# Altium PCB Driver_Board.PcbDoc (part 1 of 3)
Units mm, origin at the board's own origin, x right, y up, seen from the top; angles counter-clockwise.
Board outline 99.79 x 84.12 mm, 4 copper layers (Top Layer, Layer 1, Layer 2, Bottom Layer), stack 0.603 mm thick; 126 components, 86 nets, 479 pads, 531 vias.
Unrouted connection lines stored in the file: 62.
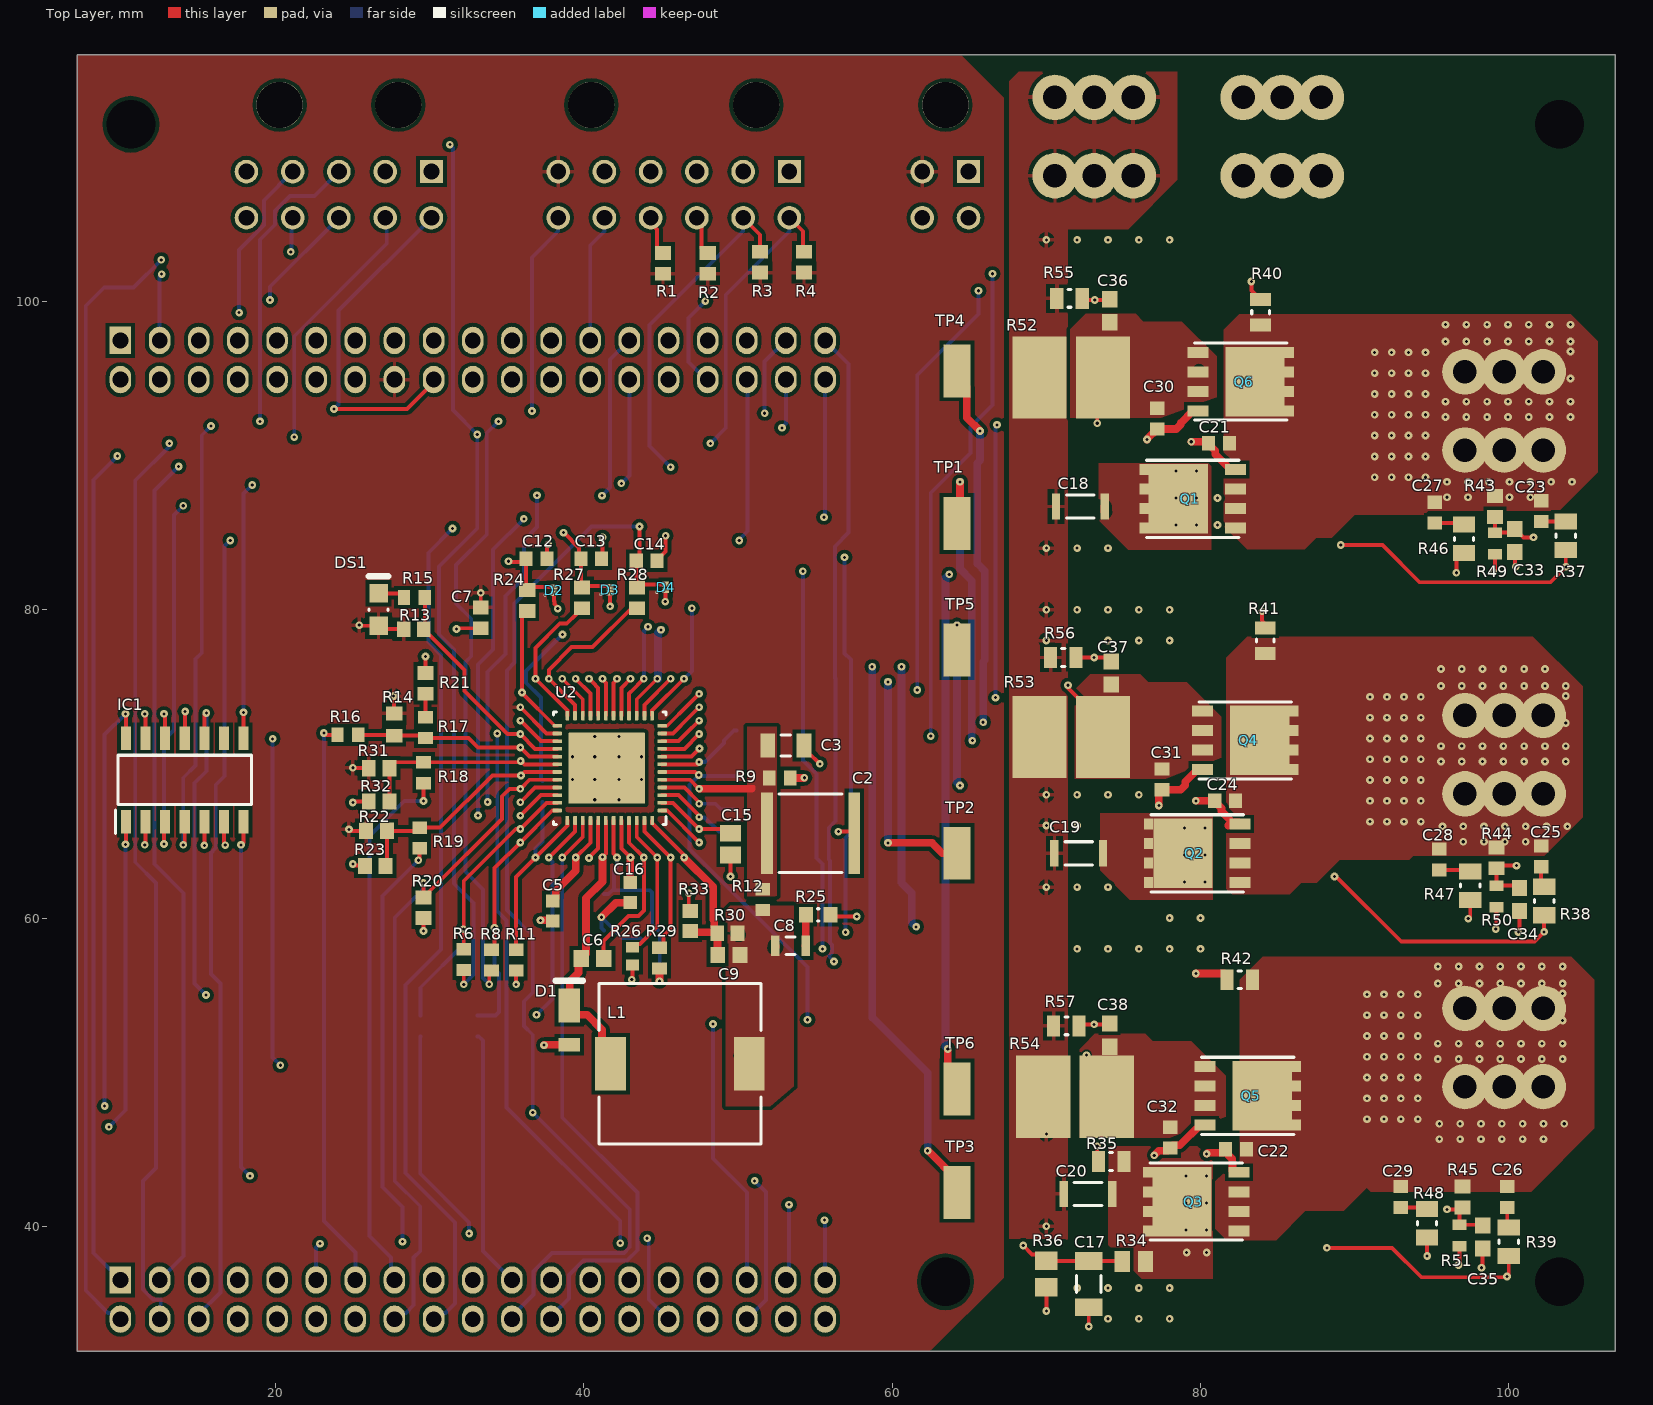
[diagram p0: Top Layer view]
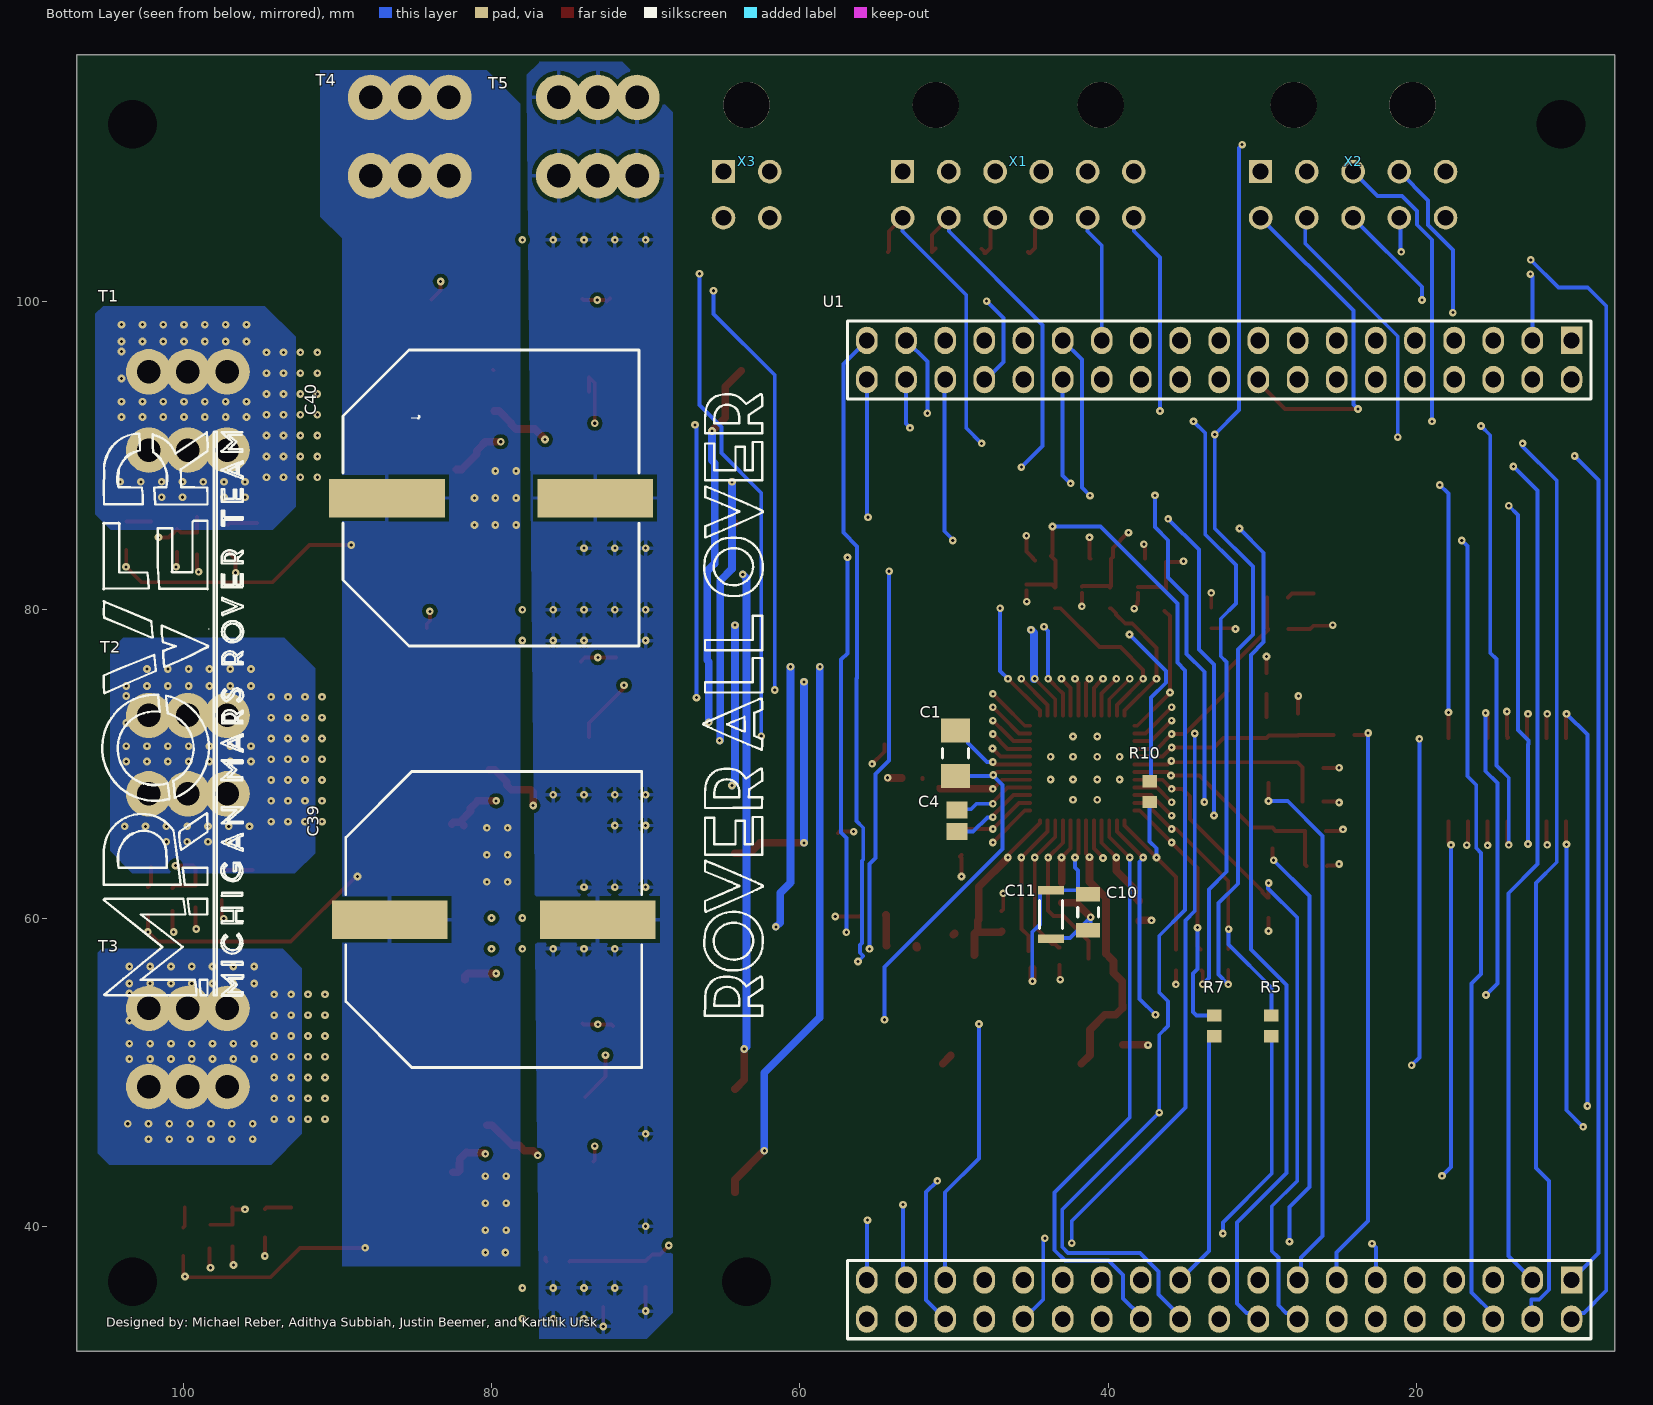
[diagram p1: Bottom Layer view, seen from below]
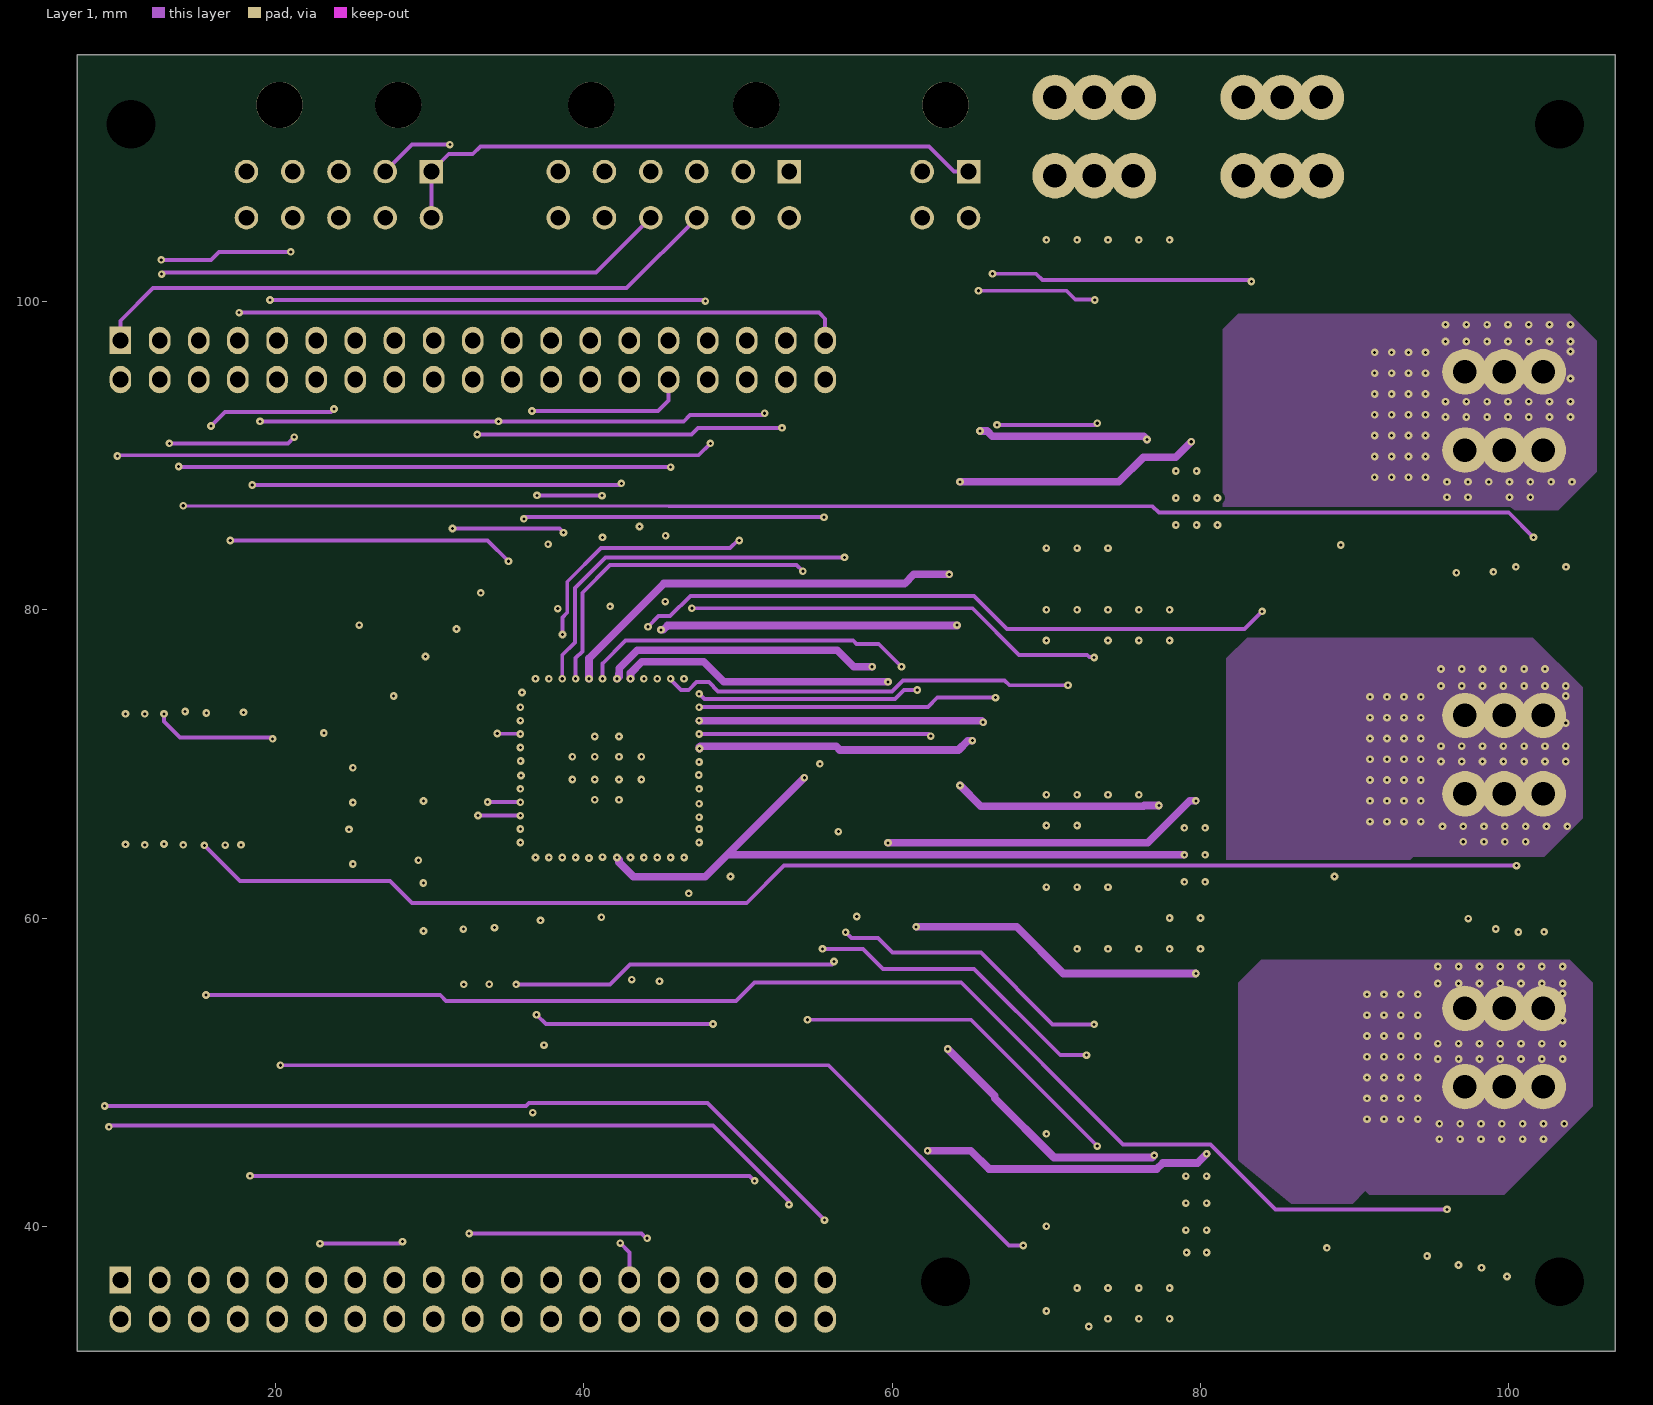
[diagram p2: Layer 1]
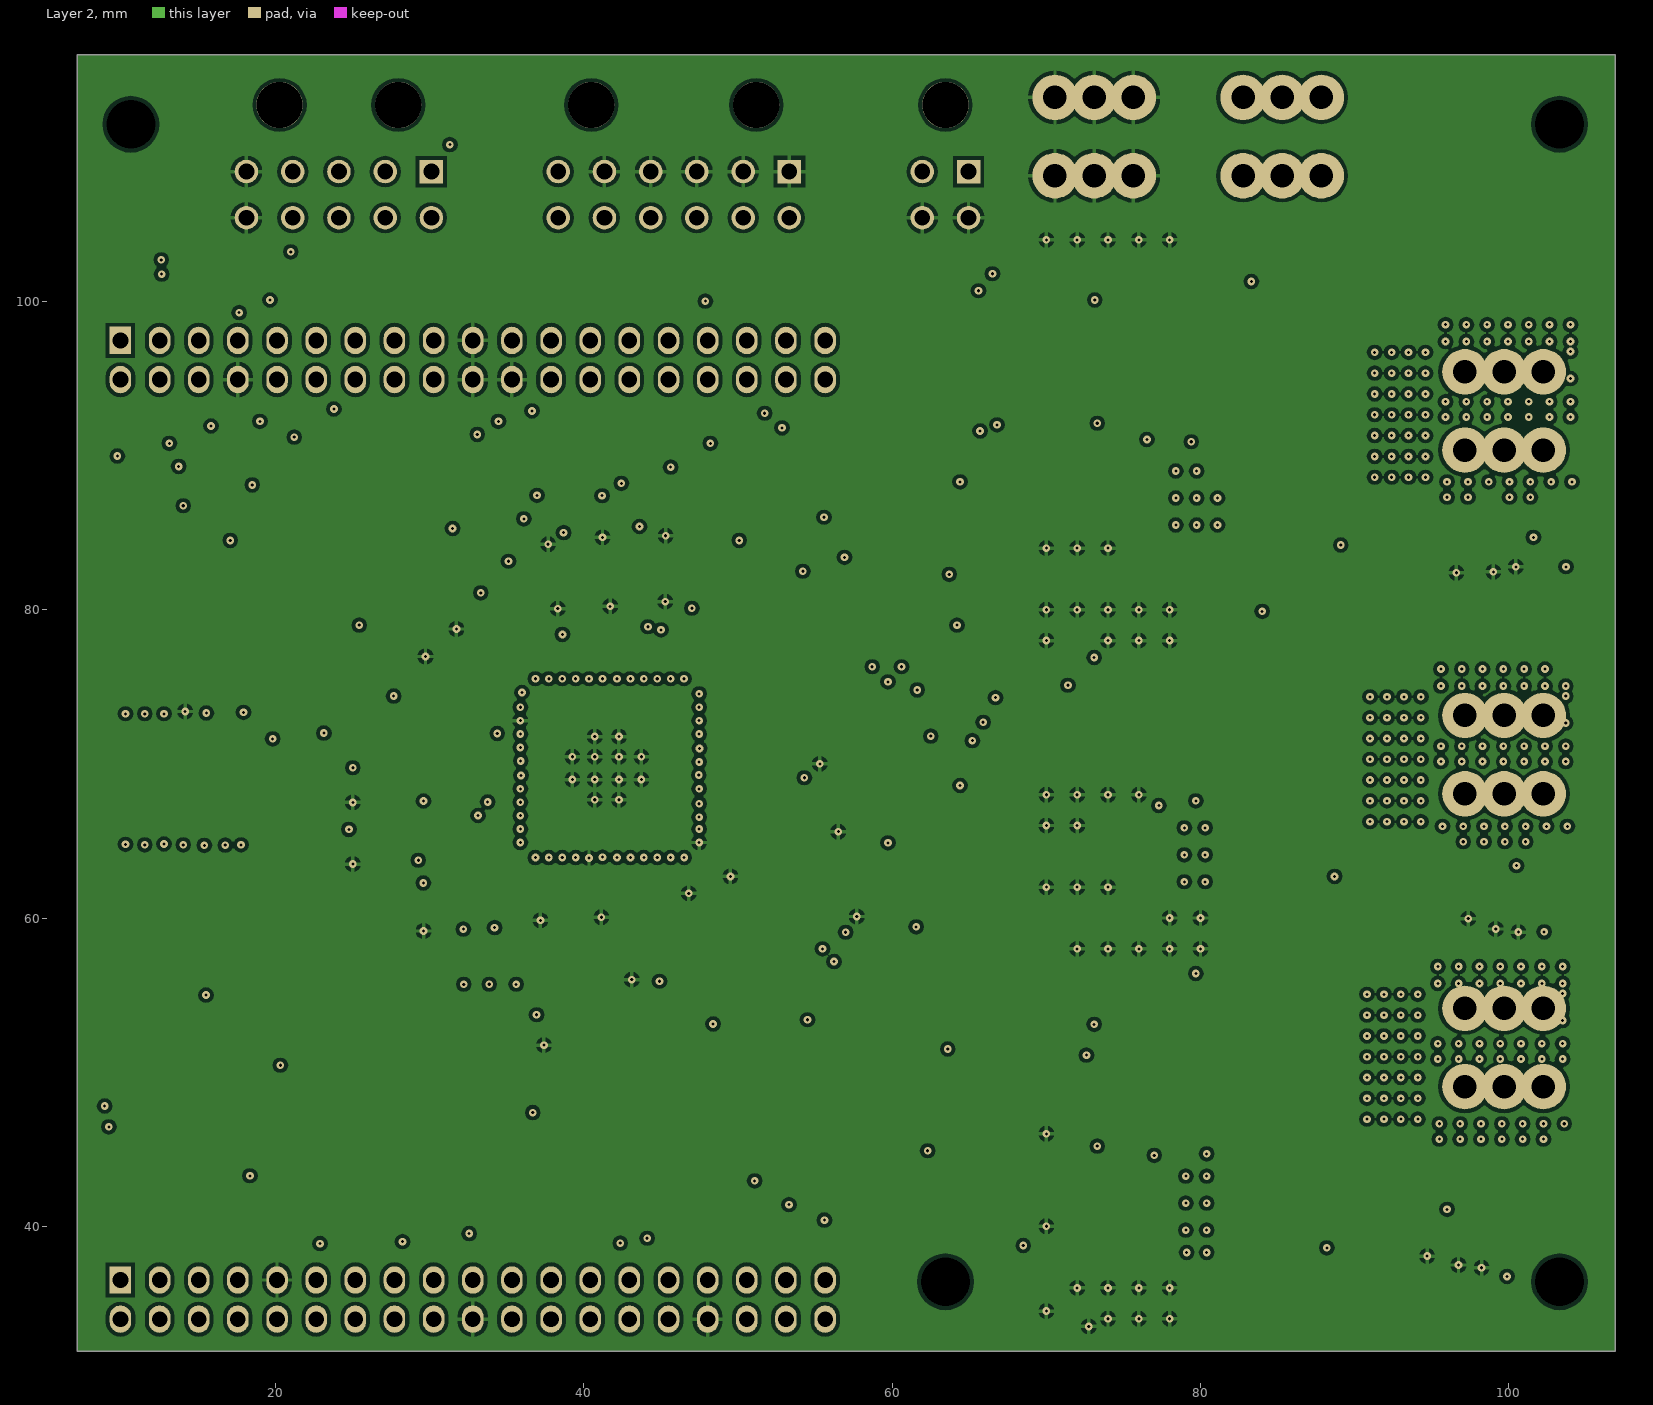
[diagram p3: Layer 2]
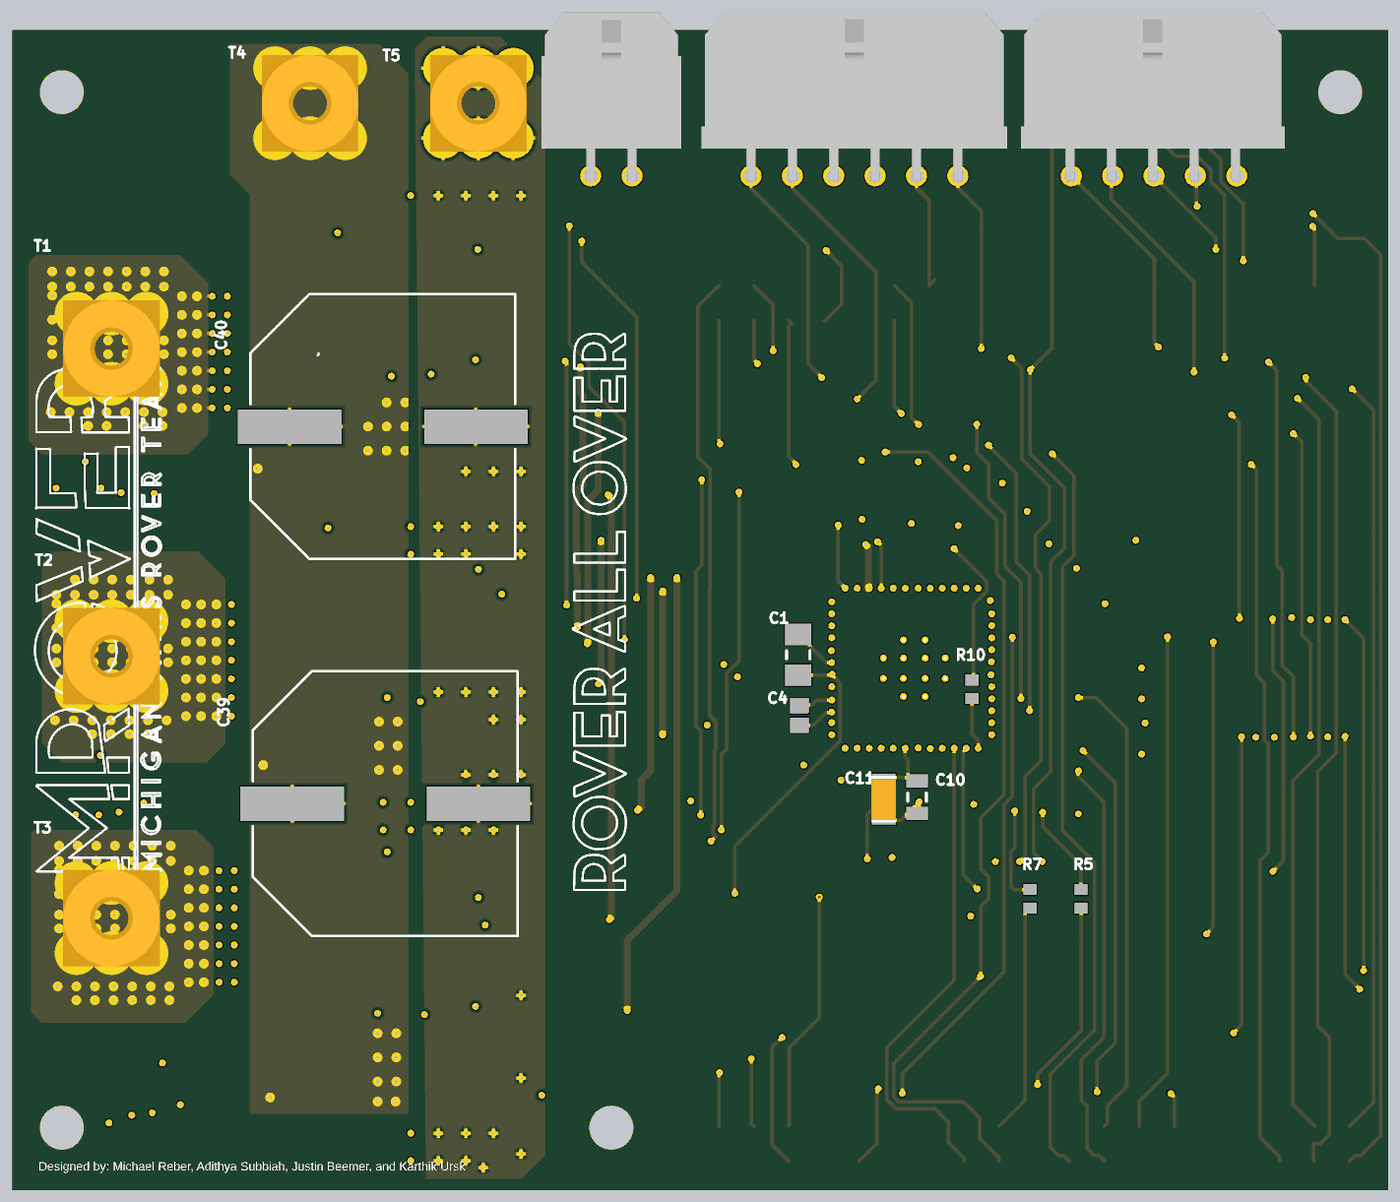
[diagram p5: 3D render of the assembled board from below, using the file's embedded part models]

## Layer stack, top to bottom
Top Solder: solder mask 0.0102, Solder Resist, Dk 3.5
Top Layer: signal copper 0.0356
Dielectric 2: prepreg 0.0711, PP-006, Dk 4.1
Layer 1: signal copper 0.035
Dielectric 1: dielectric 0.32, FR-4, Dk 4.8
Layer 2: signal copper 0.035
Dielectric 3: prepreg 0.0711, PP-006, Dk 4.1
Bottom Layer: signal copper 0.0356
Bottom Solder: solder mask 0.0102, Solder Resist, Dk 3.5

## Board outline
7.112,31.877 106.9,31.877 106.9,116 7.112,116

## Design rules (kind name [scope] priority, off if disabled: settings)
Clearance [All] p1: gap=0.24 ignorepadtopadclearanceinfootprint=FALSE except(0: Arc-Hole Track-Hole SMDPad-Hole THPad-Hole Via-Hole Fill-Hole Poly-Hole Region-Hole Text-Hole)
PolygonConnect DC_Caps [(InComponent('C39') OR InComponent('C40'))] p1: connectstyle=Relief reliefconductorwidth=0.254 reliefentries=4 polygonreliefangle="90 Angle" airgapwidth=0.254
PolygonConnect Shunt_Res [(InComponent('R52') OR InComponent('R53') OR InComponent('R54'))] p2: connectstyle=Direct reliefconductorwidth=0.254 reliefentries=4 polygonreliefangle="90 Angle" airgapwidth=0.254
PolygonConnect SPx [(InNet('SPA') OR InNet('SPB') OR InNet('SPC'))] p3: connectstyle=Direct reliefconductorwidth=0.254 reliefentries=4 polygonreliefangle="90 Angle" airgapwidth=0.254
PolygonConnect VBUCK [InNet('VBUCK')] p4: connectstyle=Direct reliefconductorwidth=0.254 reliefentries=4 polygonreliefangle="90 Angle" airgapwidth=0.254
PolygonConnect DRV_VM [InNet('DRV_VM')] p5: connectstyle=Direct reliefconductorwidth=0.254 reliefentries=4 polygonreliefangle="90 Angle" airgapwidth=0.254
PolygonConnect VM_Power [InNet('VM')Or InNet('MOTA') Or InNet('MOTB') Or InNet('MOTC') Or InComponent('R49') Or InComponent('R50') Or InComponent('R51')] p6: connectstyle=Direct reliefconductorwidth=0.254 reliefentries=4 polygonreliefangle="90 Angle" airgapwidth=0.254
PolygonConnect [All] p7: connectstyle=Relief reliefconductorwidth=0.254 reliefentries=4 polygonreliefangle="90 Angle" airgapwidth=0.254
RoutingVias [All] p1: holewidth=0.711 width=1.27 viastyle="Through Hole" minholewidth=0.711 minwidth=1.27 maxholewidth=0.711 maxwidth=1.27 useviatemplates=TRUE viatemplateguid#1={88C28F50-8440-48BC-975D-7D79779B8CFD} viatemplatename#1=v50h20
SolderMaskExpansion [All] p1: expansion=0.102
Width [All] p1: maxlimit=0.5 minlimit=0.254 preferedwidth=0.254 minimp=50.000000 maximp=50.000000 favimp=50.000000
30 further rules are at their usual default settings.

## Components (designator, comment, footprint, x,y, rotation, side; value= is the part's Value field where it differs from the comment)
C1 "GRM31CR72A105KA01L" CAPC3216X180X55ML20T25 49.9,70.7 r270 bottom
C2 "C5750X7S2A106M230KB" TDK-C5750-2_L 54.7,65.5 r180 top
C3 "C2012X7R2A104K125AA" CAPC2013X145X20ML20 53.1,71.2 r180 top
C4 "C0805C473K1RACTU" CAPC2013X110X50LL20T25 49.8,66.3 r90 bottom
C5 "C0603C105K4RACTU" CAPC1608X90X35LL15T15 37.975,60.45 r90 top
C6 "C0603C103K4RACTU" CAPC1608X87X35ML15T15 40.55,57.375 r180 top
C7 "C0603C104J4RACTU" CAPC1608X87X35NL15T15 33.3,79.475 r90 top
C8 "C2012X7R1H225K125AC" CAPC2013X145X20LL20 53.4,58.2 r180 top
C9 "GRM1885C1H362JA01D" CAPC1608X90X35ML10T15 49.4,57.6 r0 top
C10 "C2012X7R2A104K125AA" CAPC2013X145X20ML20 41.287,60.373 r90 bottom
C11 "C3216X7R2A105K160AA" CAPC3216X180X20LL20 43.7,60.227 r90 bottom
C12 "GRM188R71C222KA01D" CAPC1608X90X35NL10T15 36.917,83.312 r180 top
C13 "GRM188R71C222KA01D" CAPC1608X90X35NL10T15 40.473,83.312 r180 top
C14 "GRM188R71C222KA01D" CAPC1608X90X35NL10T15 44.069,83.185 r180 top
C15 "C0805C105K3RACTU" CAPC2013X140X50LL20T25 49.5,64.8 r90 top
C16 "C0603C105K4RACTU" CAPC1608X90X35LL15T15 43,61.65 r90 top
C17 "CAP 47nF 100V 1206(3216)" CAPC1206(3216)170_N 72.75,36.25 r90 top value=47nF
C18 "C3216X7R2A105K160AA" CAPC3216X180X20LL20 72.2,86.7 r0 top
C19 "C3216X7R2A105K160AA" CAPC3216X180X20LL20 72.1,64.2 r0 top
C20 "C3216X7R2A105K160AA" CAPC3216X180X20LL20 72.7,42.1 r0 top
C21 "GRM188R72A222KA01D" CAPC1608X90X35NL10T15 81.2,90.8 r180 top
C22 "GRM188R72A222KA01D" CAPC1608X90X35NL10T15 82.3,45 r180 top
C23 "GRM188R72A222KA01D" CAPC1608X90X35NL10T15 102.1,86.4 r270 top
C24 "GRM188R72A222KA01D" CAPC1608X90X35NL10T15 81.6,67.6 r180 top
C25 "GRM188R72A222KA01D" CAPC1608X90X35NL10T15 102.1,64 r270 top
C26 "GRM188R72A222KA01D" CAPC1608X90X35NL10T15 99.9,41.9 r270 top
C27 "GRM188R72A222KA01D" CAPC1608X90X35NL10T15 95.2,86.3 r90 top
C28 "GRM188R72A222KA01D" CAPC1608X90X35NL10T15 95.5,63.8 r90 top
C29 "GRM188R72A222KA01D" CAPC1608X90X35NL10T15 93,41.9 r90 top
C30 "GRM188R72A222KA01D" CAPC1608X90X35NL10T15 77.2,92.4 r270 top
C31 "GRM188R72A222KA01D" CAPC1608X90X35NL10T15 77.5,69 r270 top
C32 "GRM188R72A222KA01D" CAPC1608X90X35NL10T15 78.043,45.75 r270 top
C33 "06033C473JAT2A" CAPC1608X90X35NL15T15 100.4,84.5 r90 top
C34 "06033C473JAT2A" CAPC1608X90X35NL15T15 100.7,61.2 r90 top
C35 "06033C473JAT2A" CAPC1608X90X35NL15T15 98.3,39.3 r90 top
C36 "0603YC102KAT2A" CAPC1608X90X35NL15T15 74.1,99.4 r270 top
C37 "0603YC102KAT2A" CAPC1608X90X35NL15T15 74.2,75.9 r270 top
C38 "0603YC102KAT2A" CAPC1608X90X35NL15T15 74.1,52.4 r270 top
C39 "EEV-FK2A331M" SM_RADIAL_K16 79.85,59.9 r180 bottom value=330uF
C40 "EEV-FK2A331M" SM_RADIAL_K16 80.029,87.249 r180 bottom value=330uF
D1 "DFLS1200-7" DIOD-POWERDI123-2_A_V 39.05,53.375 r90 top
D2 "PESD4V0Y1BSF" DFN40P60X32-2M 38.05,81.275 r90 top
D3 "PESD4V0Y1BSF" DFN40P60X32-2M 41.675,81.3 r90 top
D4 "PESD4V0Y1BSF" DFN40P60X32-2M 45.3,81.45 r90 top
DS1 "LTST-C170KRKT" LTST-C170KRKT_V 26.67,80.01 r90 top
IC1 "LM324LVIDR" SOIC127P600X175-14N 14.097,68.961 r90 top
L1 "7447714331" "WE-PD 1050" 46.228,50.546 r0 top
Q1 "CSD19532Q5B" Q5B 79.5,87.2 r0 top
Q2 "CSD19532Q5B" Q5B 79.8,64.2 r0 top
Q3 "CSD19532Q5B" Q5B 79.736,41.6 r0 top
Q4 "CSD19532Q5B" Q5B 82.9,71.527 r180 top
Q5 "CSD19532Q5B" Q5B 83.07,48.465 r180 top
Q6 "CSD19532Q5B" Q5B 82.6,94.8 r180 top
R1 "CRCW060347K0JNEA" RESC1609X50X30ML10T20 45.125,102.475 r270 top
R2 "CRCW060347K0JNEA" RESC1609X50X30ML10T20 48.025,102.475 r270 top
R3 "CRCW060347K0JNEA" RESC1609X50X30ML10T20 51.425,102.55 r270 top
R4 "CRCW060347K0JNEA" RESC1609X50X30ML10T20 54.275,102.55 r270 top
R5 "ERJ-3GEY0R00V" RESC1608X55X30NL15T15 29.4,53 r90 bottom
R6 "ERJ-3GEY0R00V" RESC1608X55X30NL15T15 32.2,57.3 r90 top
R7 "ERJ-3GEY0R00V" RESC1608X55X30NL15T15 33.1,53 r90 bottom
R8 "ERJ-3GEY0R00V" RESC1608X55X30NL15T15 34,57.275 r90 top
R9 "ERJ-3GEY0R00V" RESC1608X55X30NL15T15 52.705,69.088 r180 top
R10 "ERJ-3GEY0R00V" RESC1608X55X30NL15T15 37.3,68.2 r90 bottom
R11 "ERJ-3GEY0R00V" RESC1608X55X30NL15T15 35.6,57.275 r90 top
R12 "ERJ-3GEY0R00V" RESC1608X55X30NL15T15 51.6,61.2 r90 top
R13 "RG1608P-103-B-T5" RESC1608X50X30NL20T20 28.956,78.74 r180 top
R14 "ERJ-3GEYJ102V" RESC1608X55X30ML15T15 27.686,72.554 r90 top
R15 "ERJ3EKF3300V" RESC1608X55X30NL15T15 29,80.8 r180 top
R16 "ERJ-3GEY0R00V" RESC1608X55X30NL15T15 24.678,71.882 r0 top
R17 "ERJ-3GEY0R00V" RESC1608X55X30NL15T15 29.718,72.35 r270 top
R18 "ERJ-3GEY0R00V" RESC1608X55X30NL15T15 29.591,69.429 r90 top
R19 "ERJ-3GEY0R00V" RESC1608X55X30NL15T15 29.337,65.191 r90 top
R20 "CRCW060347K0JNEA" RESC1609X50X30ML10T20 29.591,60.666 r90 top
R21 "CRCW060347K0JNEA" RESC1609X50X30ML10T20 29.718,75.224 r270 top
R22 "CRCW060375K0JNEA" RESC1609X50X30ML10T20 26.543,65.659 r0 top
R23 "CRCW060375K0JNEA" RESC1609X50X30ML10T20 26.456,63.373 r180 top
R24 "CRCW060356R0FKEA" RESC1609X50X30ML10T20 36.322,80.605 r270 top
R25 "2R61 1% 0603(1608)" RESC0603(1608)_N 55.2,60.2 r180 top value="2.61 Ohm"
R26 "CRCW0603107KFKEA" RESC1609X50X30LL10T20 43.15,57.525 r270 top
R27 "CRCW060356R0FKEA" RESC1609X50X30ML10T20 39.878,80.772 r270 top
R28 "CRCW060356R0FKEA" RESC1609X50X30ML10T20 43.434,80.772 r270 top
R29 "ERJ-3EKF2743V" RESC1608X55X30NL15T15 44.9,57.4 r270 top
R30 "RG1608P-103-B-T5" RESC1608X50X30NL20T20 49.3,59 r0 top
R31 "CRCW060375K0JNEA" RESC1609X50X30ML10T20 26.71,69.723 r0 top
R32 "CRCW060375K0JNEA" RESC1609X50X30ML10T20 26.71,67.564 r180 top
R33 "RG1608P-2611-B-T5" RESC1608X50X30NL20T20 46.9,59.8 r270 top
R34 "ERA6AEB3833V" RESC2013X60X40LL20T25 75.68,37.719 r0 top
R35 "CRCW08050000Z0EA" RESC2013X50X30LL20T20 74.2,44.2 r0 top
R36 "ERA6AEB9761V" RESC2013X60X40NL20T25 70,36.9 r90 top
R37 "CRCW08052R70JNEA" RESC2013X50X30NL20T20 103.7,84.8 r270 top
R38 "CRCW08052R70JNEA" RESC2013X50X30NL20T20 102.3,61.1 r270 top
R39 "CRCW08052R70JNEA" RESC2013X50X30NL20T20 100,39 r270 top
R40 "CRCW08050000Z0EA" RESC2013X50X30LL20T20 83.9,99.3 r270 top
R41 "CRCW08050000Z0EA" RESC2013X50X30LL20T20 84.2,78 r270 top
R42 "CRCW08050000Z0EA" RESC2013X50X30LL20T20 82.55,56 r0 top
R43 "CRCW0603383KFKEA" RESC1609X50X30ML10T20 99.1,86.7 r90 top
R44 "CRCW0603383KFKEA" RESC1609X50X30ML10T20 99.2,63.9 r90 top
R45 "CRCW0603383KFKEA" RESC1609X50X30ML10T20 97,41.9 r90 top
R46 "CRCW08052R70JNEA" RESC2013X50X30NL20T20 97.1,84.6 r90 top
R47 "CRCW08052R70JNEA" RESC2013X50X30NL20T20 97.5,62.1 r90 top
R48 "CRCW08052R70JNEA" RESC2013X50X30NL20T20 94.7,40.2 r90 top
R49 "RC0603FR-079K76L" RESC1608X55X25NL10T15 99.1,84.3 r270 top
R50 "RC0603FR-079K76L" RESC1608X55X25NL10T15 99.2,61.4 r270 top
R51 "RC0603FR-079K76L" RESC1608X55X25NL10T15 96.8,39.4 r270 top
R52 "WSHM2818" PCBComponent_1 73.67,95.075 r90 top
R53 "WSHM2818" PCBComponent_1 73.67,71.75 r90 top
R54 "WSHM2818" PCBComponent_1 73.92,48.4 r90 top
R55 "CRCW08050000Z0EA" RESC2013X50X30LL20T20 71.5,100.2 r180 top
R56 "CRCW08050000Z0EA" RESC2013X50X30LL20T20 71.1,76.9 r180 top
R57 "CRCW08050000Z0EA" RESC2013X50X30LL20T20 71.3,53 r180 top
T1 "Wurth Electronics 7461057" "Redcube 7461057" 99.7,92.9 r180 bottom
T2 "Wurth Electronics 7461057" "Redcube 7461057" 99.7,70.6 r180 bottom
T3 "Wurth Electronics 7461057" "Redcube 7461057" 99.7,51.6 r180 bottom
T4 "Wurth Electronics 7461057" "Redcube 7461057" 85.3,110.7 r180 bottom
T5 "Wurth Electronics 7461057" "Redcube 7461057" 73.1,110.7 r180 bottom
TP1 "5015" KSTN-5015_V 64.2,85.6 r90 top
TP2 "5015" KSTN-5015_V 64.2,64.2 r270 top
TP3 "5015" KSTN-5015_V 64.2,42.2 r90 top
TP4 "5015" KSTN-5015_V 64.2,95.5 r90 top
TP5 "5015" KSTN-5015_V 64.2,77.4 r90 top
TP6 "5015" KSTN-5015_V 64.2,48.9 r90 top
U1 "STM Nucleo-F303RE" "Nucleo MORPHO CONNECTORS" -12.427,72.075 r270 bottom locked
U2 "DRV8353RSRGZR" DRV8353RS 41.483,69.723 r0 top
X1 "Molex - Micro-Fit 3.0 Series connector,  3.00mm (0.118\") pitch header, 12 positions." 43045-1200 45.825,112.751 r0 bottom
X2 "Molex - Micro-Fit 3.0 Series connector,  3.00mm (0.118\") pitch header, 10 positions." 43045-1000 24.1,112.751 r0 bottom
X3 "Molex - Micro-Fit 3.0 Series connector,  3.00mm (0.118\") pitch header, 4 positions." 43045-0400 63.45,112.751 r0 bottom

## Footprints (in the part's own frame and the unit in brackets; to place one, negate y for a bottom-side part, rotate by r counter-clockwise, add the part's x,y. Pads: shape width x height; smd on the part's side, far side on the other; paste and mask are expansions set on the pad)
43045-0400 [mm]
  round 3 hole 3 unplated: 1(0,0)
  rect 1.482x1.482 / inner rect 1.524x1.524 / far side rect 1.482x1.482 hole 1.02: P$1(1.5,4.32)
  round 1.53 / inner round 1.524 / far side round 1.53 hole 1.02: P$2(-1.5,4.32) P$3(1.5,7.32) P$4(-1.5,7.32)
  body extent -5.07,-4.55 5.08,7.69, height 8.83
43045-1000 [mm]
  round 3 hole 3 unplated: 1(-3.85,0) 1(3.85,0)
  rect 1.482x1.482 / inner rect 1.524x1.524 / far side rect 1.482x1.482 hole 1.02: P$1(6,4.32)
  round 1.53 / inner round 1.524 / far side round 1.53 hole 1.02: P$2(3,4.32) P$3(0,4.32) P$4(-3,4.32) P$5(-6,4.32) P$6(6,7.32) P$7(3,7.32) P$8(0,7.32) P$9(-3,7.32) P$10(-6,7.32)
  body extent -9.49,-4.57 9.66,7.67, height 8.53
43045-1200 [mm]
  round 3 hole 3 unplated: 1(-5.35,0) 1(5.35,0)
  rect 1.482x1.482 / inner rect 1.524x1.524 / far side rect 1.482x1.482 hole 1.02: P$1(7.5,4.32)
  round 1.53 / inner round 1.524 / far side round 1.53 hole 1.02: P$2(4.5,4.32) P$3(1.5,4.32) P$4(-1.5,4.32) P$5(-4.5,4.32) P$6(-7.5,4.32) P$7(7.5,7.32) P$8(4.5,7.32) P$9(1.5,7.32) P$10(-1.5,7.32) P$11(-4.5,7.32) P$12(-7.5,7.32)
  body extent -11.07,-4.57 11.08,7.67, height 8.52
CAPC1206(3216)170_N [mm] "Chip Capacitor, Body 3.2x1.6mm, Height 1.7mm, IPC Medium Density"
  rect 1.15x1.8 smd: 1(-1.5,0) 2(1.5,0)
  silkscreen extent -0.55,-0.8 0.55,0.8, body extent -1.7,-0.9 1.7,0.9, height 1.7
CAPC1608X87X35ML15T15 [mm] "Chip Capacitor, 2-Leads, Body 1.60x0.80mm, IPC Low Density"
  rect 1x1.1 smd: 1(-0.725,0) 2(0.725,0)
  body extent -0.87,-0.48 0.87,0.47, height 0.87
CAPC1608X87X35NL15T15 [mm] "Chip Capacitor, 2-Leads, Body 1.60x0.80mm, IPC Medium Density"
  rect 0.9x1 smd: 1(-0.675,0) 2(0.675,0)
  body extent -0.87,-0.48 0.87,0.47, height 0.87
CAPC1608X90X35LL15T15 [mm] "Chip Capacitor, 2-Leads, Body 1.60x0.81mm, IPC High Density"
  rect 0.85x0.9 smd: 1(-0.65,0) 2(0.65,0)
  body extent -0.88,-0.48 0.87,0.48, height 0.9
CAPC1608X90X35ML10T15 [mm] "Chip Capacitor, 2-Leads, Body 1.60x0.80mm, IPC Low Density"
  rect 0.95x1.05 smd: 1(-0.725,0) 2(0.725,0)
  body extent -0.85,-0.45 0.85,0.45, height 0.9
CAPC1608X90X35NL10T15 [mm] "Chip Capacitor, 2-Leads, Body 1.60x0.80mm, IPC Medium Density"
  rect 0.85x0.95 smd: 1(-0.675,0) 2(0.675,0)
  body extent -0.85,-0.45 0.85,0.45, height 0.9
CAPC1608X90X35NL15T15 [mm] "Chip Capacitor, 2-Leads, Body 1.60x0.81mm, IPC Medium Density"
  rect 1.05x1 smd: 1(-0.75,0) 2(0.75,0)
  body extent -0.88,-0.48 0.87,0.48, height 0.9
CAPC2013X110X50LL20T25 [mm] "Chip Capacitor, 2-Leads, Body 2.00x1.25mm, IPC High Density"
  rect 1.1x1.35 smd: 1(-0.7,0) 2(0.7,0)
  body extent -1.1,-0.72 1.1,0.72, height 1.1
CAPC2013X140X50LL20T25 [mm] "Chip Capacitor, 2-Leads, Body 2.00x1.25mm, IPC High Density"
  rect 1.1x1.35 smd: 1(-0.7,0) 2(0.7,0)
  body extent -1.1,-0.72 1.1,0.72, height 1.4
CAPC2013X145X20LL20 [mm] "Chip Capacitor, 2-Leads, Body 2.20x1.45mm, IPC High Density"
  rect 0.55x1.35 smd: 1(-0.975,0) 2(0.975,0)
  silkscreen extent -0.3,-0.58 0.3,0.58, body extent -1.1,-0.72 1.1,0.72, height 1.45
CAPC2013X145X20ML20 [mm] "Chip Capacitor, 2-Leads, Body 2.20x1.45mm, IPC Low Density"
  rect 0.95x1.55 smd: 1(-1.175,0) 2(1.175,0)
  silkscreen extent -0.3,-0.67 0.3,0.67, body extent -1.1,-0.72 1.1,0.72, height 1.45
CAPC3216X180X20LL20 [mm] "Chip Capacitor, 2-Leads, Body 3.40x1.80mm, IPC High Density"
  rect 0.55x1.7 smd: 1(-1.575,0) 2(1.575,0)
  silkscreen extent -0.9,-0.75 0.9,0.75, body extent -1.7,-0.9 1.7,0.9, height 1.8
CAPC3216X180X55ML20T25 [mm] "Chip Capacitor, 2-Leads, Body 3.4x1.8mm, IPC Low Density"
  rect 1.55x1.9 smd: 1(-1.475,0) 2(1.475,0)
  silkscreen extent -0.3,-0.85 0.3,0.85, body extent -1.7,-0.9 1.7,0.9, height 1.8
DFN40P60X32-2M [mm] "DFN, 2-Leads, Body 0.30x0.60mm, Pitch 0.40mm, IPC Low Density"
  rect 0.35x0.45 smd: 1(-0.2,0) 2(0.2,0)
  silkscreen extent -0.36,0.52 -0.27,0.61, body extent -0.31,-0.16 0.31,0.16, height 0.32
DIOD-POWERDI123-2_A_V [mm] "SOD, 2-Leads, Body 2.8x1.78mm"
  rect 0.9x1.4 smd: 1(-1.6,0)
  rect 2.2x1.4 smd: 2(0.95,0)
  silkscreen extent 2.55,-0.89 2.55,0.89, body extent -1.4,-0.89 1.4,0.89, height 1.01
DRV8353RS [mm]
  rrect42% 0.6x0.24 smd: 1(3.588,-2.75) 2(3.588,-2.25) 3(3.588,-1.75) 4(3.588,-1.25) 5(3.588,-0.75) 6(3.588,-0.25) 7(3.588,0.25) 8(3.588,0.75) 9(3.588,1.25) 10(3.588,1.75) 11(3.588,2.25) 12(3.588,2.75) 25(-3.212,2.75) 26(-3.212,2.25) 27(-3.212,1.75) 28(-3.212,1.25) 29(-3.212,0.75) 30(-3.212,0.25) 31(-3.212,-0.25) 32(-3.212,-0.75) 33(-3.212,-1.25) 34(-3.212,-1.75) 35(-3.212,-2.25) 36(-3.212,-2.75)
  rrect42% 0.24x0.6 smd: 13(2.938,3.4) 14(2.438,3.4) 15(1.938,3.4) 16(1.438,3.4) 17(0.938,3.4) 18(0.438,3.4) 19(-0.062,3.4) 20(-0.562,3.4) 21(-1.062,3.4) 22(-1.562,3.4) 23(-2.062,3.4) 24(-2.562,3.4) 37(-2.562,-3.4) 38(-2.062,-3.4) 39(-1.562,-3.4) 40(-1.062,-3.4) 41(-0.562,-3.4) 42(-0.062,-3.4) 43(0.438,-3.4) 44(0.938,-3.4) 45(1.438,-3.4) 46(1.938,-3.4) 47(2.438,-3.4) 48(2.938,-3.4)
  rrect8% 1.37x1.28 on Top Paste: 49(-1.57,-1.48) 49(-1.57,0) 49(-1.57,1.48) 49(0,-1.48) 49(0,0) 49(0,1.48) 49(1.57,-1.48) 49(1.57,0) 49(1.57,1.48)
  rrect2% 4.975x4.6 smd paste-2.575: 49(0,0)
  silkscreen extent -3.46,-3.65 3.84,3.65, body extent -3.31,-3.5 3.69,3.5, height 1
KSTN-5015_V [mm] "SMD, Body 2.63x1.02mm"
  rect 3.43x1.78 smd: 1(0,0)
  body extent -1.53,-0.51 1.53,0.49, height 1.49
LTST-C170KRKT_V [mm] "SMD, 2-Leads, Body 2x1.25mm"
  rect 1.2x1.2 smd: 1(-1.05,0) 2(1.05,0)
  silkscreen extent -0.05,-0.63 2.16,0.64, body extent -1,-0.63 1,0.63, height 1.2
"Nucleo MORPHO CONNECTORS" [mil] "STM32F401RE Nucleo - Morpho Connectors"
  rect 70x55 hole 40: 1(-1000,-880) 39(1400,-880)
  oval 70x55 hole 40: 2(-1000,-980) 3(-1000,-1080) 4(-1000,-1180) 5(-1000,-1280) 6(-1000,-1380) 7(-1000,-1480) 8(-1000,-1580) 9(-1000,-1680) 10(-1000,-1780) 11(-1000,-1880) 12(-1000,-1980) 13(-1000,-2080) 14(-1000,-2180) 15(-1000,-2280) 16(-1000,-2380) 17(-1000,-2480) 18(-1000,-2580) 19(-1000,-2680) 20(-900,-880) 21(-900,-980) 22(-900,-1080) 23(-900,-1180) 24(-900,-1280) 25(-900,-1380) 26(-900,-1480) 27(-900,-1580) 28(-900,-1680) 29(-900,-1780) 30(-900,-1880) 31(-900,-1980) 32(-900,-2080) 33(-900,-2180) 34(-900,-2280) 35(-900,-2380) 36(-900,-2480) 37(-900,-2580) 38(-900,-2680) 40(1400,-980) 41(1400,-1080) 42(1400,-1180) 43(1400,-1280) 44(1400,-1380) 45(1400,-1480) 46(1400,-1580) 47(1400,-1680) 48(1400,-1780) 49(1400,-1880) 50(1400,-1980) 51(1400,-2080) 52(1400,-2180) 53(1400,-2280) 54(1400,-2380) 55(1400,-2480) 56(1400,-2580) 57(1400,-2680) 58(1500,-880) 59(1500,-980) 60(1500,-1080) 61(1500,-1180) 62(1500,-1280) 63(1500,-1380) 64(1500,-1480) 65(1500,-1580) 66(1500,-1680) 67(1500,-1780) 68(1500,-1880) 69(1500,-1980) 70(1500,-2080) 71(1500,-2180) 72(1500,-2280) 73(1500,-2380) 74(1500,-2480) 75(1500,-2580) 76(1500,-2680)
  silkscreen extent -1050,-2730 1550,-830
PCBComponent_1 [mm]
  rect 5.33x3.51 smd: 1(0,0) 2(0,4.12)
Q5B [mm]
  rect 1.372x0.71 smd: 1(2.77,-1.905) 2(2.77,-0.635) 3(2.77,0.635) 4(2.77,1.905)
  rect 0.59x0.71 smd: 5(-3.161,1.905) 6(-3.161,0.635) 7(-3.161,-0.635) 8(-3.161,-1.905)
  rect 3.85x4.52 smd: 9(-0.936,0)
  silkscreen extent -3,-2.5 3,2.5
"Redcube 7461057" [mm] "Wurth Electronics"
  round 2.95 hole 1.525: 1(-2.54,2.54) 2(0,2.54) 3(2.54,2.54) 4(-2.54,-2.54) 5(0,-2.54) 6(2.54,-2.54)
  body extent -3.5,-3.5 3.5,3.5, height 6
RESC0603(1608)_N [mm] "Chip Resistor, Body 1.6x0.8mm, IPC Medium Density"
  rect 0.9x1 smd: 1(-0.8,0) 2(0.8,0)
  silkscreen extent -0.05,-0.4 0.05,0.4, body extent -0.85,-0.47 0.85,0.47, height 0.6
RESC1608X50X30NL20T20 [mm] "Chip Resistor, 2-Leads, Body 1.60x0.80mm, IPC Medium Density"
  rect 0.9x1 smd: 1(-0.65,0) 2(0.65,0)
  body extent -0.9,-0.5 0.9,0.5, height 0.5
RESC1608X55X25NL10T15 [mm] "Chip Resistor, 2-Leads, Body 1.60x0.80mm, IPC Medium Density"
  rect 0.7x0.9 smd: 1(-0.7,0) 2(0.7,0)
  body extent -0.85,-0.45 0.85,0.45, height 0.55
RESC1608X55X30ML15T15 [mm] "Chip Resistor, 2-Leads, Body 1.60x0.80mm, IPC Low Density"
  rect 0.9x1.05 smd: 1(-0.725,0) 2(0.725,0)
  body extent -0.87,-0.48 0.87,0.48, height 0.55
RESC1608X55X30NL15T15 [mm] "Chip Resistor, 2-Leads, Body 1.60x0.80mm, IPC Medium Density"
  rect 0.8x0.95 smd: 1(-0.675,0) 2(0.675,0)
  body extent -0.87,-0.48 0.87,0.48, height 0.55
RESC1609X50X30LL10T20 [mm] "Chip Resistor, 2-Leads, Body 1.55x0.85mm, IPC High Density"
  rect 0.7x0.85 smd: 1(-0.575,0) 2(0.575,0)
  body extent -0.82,-0.48 0.82,0.48, height 0.5
RESC1609X50X30ML10T20 [mm] "Chip Resistor, 2-Leads, Body 1.55x0.85mm, IPC Low Density"
  rect 0.9x1.05 smd: 1(-0.675,0) 2(0.675,0)
  body extent -0.82,-0.48 0.82,0.48, height 0.5
RESC2013X50X30LL20T20 [mm] "Chip Resistor, 2-Leads, Body 2.00x1.25mm, IPC High Density"
  rect 0.85x1.35 smd: 1(-0.825,0) 2(0.825,0)
  silkscreen extent -0.1,-0.58 0.1,0.58, body extent -1.1,-0.72 1.1,0.72, height 0.5
RESC2013X50X30NL20T20 [mm] "Chip Resistor, 2-Leads, Body 2.00x1.25mm, IPC Medium Density"
  rect 1.05x1.45 smd: 1(-0.925,0) 2(0.925,0)
  silkscreen extent -0.1,-0.63 0.1,0.63, body extent -1.1,-0.72 1.1,0.72, height 0.5
RESC2013X60X40LL20T25 [mm] "Chip Resistor, 2-Leads, Body 2.00x1.25mm, IPC High Density"
  rect 1x1.35 smd: 1(-0.75,0) 2(0.75,0)
  body extent -1.1,-0.72 1.1,0.72, height 0.6
RESC2013X60X40NL20T25 [mm] "Chip Resistor, 2-Leads, Body 2.00x1.25mm, IPC Medium Density"
  rect 1.2x1.45 smd: 1(-0.85,0) 2(0.85,0)
  body extent -1.1,-0.72 1.1,0.72, height 0.6
SM_RADIAL_K16 [mm] "18 x 16.5mm:  Panasonic K16 (K18 from land pattern recommendation)"
  rect 7.5x2.5 smd: 1(-6.75,0) 2(6.75,0)
  silkscreen extent -9.6,-9.6 9.6,9.6, body extent -9.6,-9.6 9.6,9.6, height 17
SOIC127P600X175-14N [mm]
  rect 1.525x0.65 smd: 1(-2.712,3.81) 2(-2.712,2.54) 3(-2.712,1.27) 4(-2.712,0) 5(-2.712,-1.27) 6(-2.712,-2.54) 7(-2.712,-3.81) 8(2.712,-3.81) 9(2.712,-2.54) 10(2.712,-1.27) 11(2.712,0) 12(2.712,1.27) 13(2.712,2.54) 14(2.712,3.81)
  silkscreen extent -3.47,-4.33 1.6,4.48, body extent -3,-4.33 3,4.33, height 1.75
TDK-C5750-2_L [mm] "SMD, 2-Leads, Body 6.1x5.4mm, IPC High Density"
  rect 0.75x5.3 smd: 1(-2.825,0) 2(2.825,0)
  silkscreen extent -2.05,-2.55 2.05,2.55, body extent -3.05,-2.7 3.05,2.7, height 2.5
"WE-PD 1050" [mm] "SMD Inductor, 2-Leads, Body 10,0x10,0mm"
  rect 2x3.5 smd: 1(-4.5,0) 2(4.5,0)
  silkscreen extent -5.25,-5.2 5.25,5.2, body extent -5,-5 5,5, height 4.75

## Part data
C1: library part CMP-2000-04948-1, "Chip Capacitor, 1 uF, +/- 10%, 100 V, -55 to 125 degC, 1206 (3216 Metric), RoHS, Tape and Reel", Capacitance=1µF, Manufacturer=Murata, Operating Temperature=-55degC~125degC, Package / Case=1206(3216Metric), Package Description="2-Pin Surface Mount Device, Body 3.2 x 1.6 mm", Package Reference=1206, Ratings=-, Standard Package=1, Temperature Coefficient=X7R, Tolerance=±10%, Voltage - Rated=100V, Applications=GeneralPurpose, Catalog Drawings=GRMSeries_1206_1.6, Category=Capacitors, Datasheet URL=https://datasheet.ciiva.com/29199/454987-da-01-en-vs-kondensator-1206-29199435.pdf, Datasheet Version=Sep-11, Family=CeramicCapacitors, Featured Product=GA3SafetyRecognizedCapsandHi-CapMLCC, Features=-, Height - Seated (Max)=-, Lead Spacing=-, Lead Style=-, Manufacturer URL=http://www.murata.com/, Mounting Type=SurfaceMount,MLCC, Online Catalog=GRMSeries, Other Names=490-3909-6, Packaging=Digi-Reel, Product Training Modules=High-CapMultilayerCeramicCapacitors, Series=GRM, Size / Dimension="0.126\"Lx0.063\"W(3.20mmx1.60mm)", Thickness (Max)="0.071\"(1.80mm)"
C2: library part CMP-2000-06059-1, "Chip Capacitor, 10 uF, +/- 20%, 100 V, -55 to 125 degC, 2220 (5750 Metric), RoHS, Tape and Reel", Capacitance=10µF, Manufacturer=TDK, Operating Temperature=-55°C~125°C, Package / Case=2220(5750Metric), Package Description="SMD, 2-Leads, Body 6.1 x 5.4 mm", Package Reference=C5750-2, PCN Part Number=MLCCPartNumberChange30/Nov/2012, Ratings=-, Standard Package=1, Temperature Coefficient=X7S, Tolerance=±20%, Voltage - Rated=100V, Applications=GeneralPurpose, Catalog Drawings=CSERIES_2220_2.5, Category=Capacitors, Datasheet URL=https://datasheet.ciiva.com/24216/c5750x7s2a106m230kb-265716-24216594.pdf, Datasheet Version=09/2013, Family=CeramicCapacitors, Featured Product=Compact,High-CapacitanceMultilayerCeramicChipCapacitorsMidVoltageX7S-100VMLCCsC-SeriesMidVoltageMLCCs, Features=-, Height - Seated (Max)=-, Kits=445-9009-KIT-ND-KITCAPCERHICAP100V-630VSMDSAMPLEKIT1008-ND-KITCAPCERMLCC100V-630V, Lead Spacing=-, Lead Style=-, Manufacturer URL=http://www.tdk.com/, Mounting Technology=SurfaceMount, Mounting Type=SurfaceMount,MLCC, Online Catalog=CSeries,MidVoltage, Other Names=445-5212-1, Packaging=CutTape(CT), Product Training Modules=SEAT,CCV,andTVCLDesignToolsCSeriesMidVoltageCapacitorsFamilyGuidetoReplacinganElectrolyticCapacitorwithanMLCC, RoHS Information=RoHSCertificate-MLCC, Series=C, Size / Dimension="0.224\"Lx0.197\"W(5.70mmx5.00mm)", Thickness (Max)="0.098\"(2.50mm)"
C3: library part CMP-2000-05453-1, "Chip Capacitor, 100 nF, +/- 10%, 100 V, -55 to 1255 degC, 0805 (2012 Metric), RoHS, Tape and Reel", Capacitance=0.1µF, Manufacturer=TDK, Operating Temperature=-55degC~125degC, Package / Case=0805(2012Metric), Package Description="2-Pin Surface Mount Device, Body 2 x 1.25 mm", Package Reference=805, PCN Part Number=MLCCPartNumberChange30/Nov/2012, Ratings=-, Standard Package=1, Temperature Coefficient=X7R, Tolerance=±10%, Voltage - Rated=100V, Applications=GeneralPurpose, Catalog Drawings=CSERIES_2012-0805_1.45, Category=Capacitors, Datasheet URL=https://datasheet.ciiva.com/11788/0900766b80fc5cba-11788142.pdf, Datasheet Version=Jul-13, Family=CeramicCapacitors, Featured Product=C-SeriesMidVoltageMLCCs, Features=-, Height - Seated (Max)=-, Kits=SAMPLEKIT1008-ND-KITCAPCERMLCC100V-630V, Lead Spacing=-, Lead Style=-, Manufacturer URL=http://www.tdk.com/, Mounting Type=SurfaceMount,MLCC, Online Catalog=CSeries,MidVoltage, Other Names=445-1418-1, Packaging=CutTape(CT), Product Training Modules=HighCapacitanceReplacementSEAT,CCV,andTVCLDesignToolsGuidetoReplacinganElectrolyticCapacitorwithanMLCC, RoHS Information=RoHSCertificate-MLCC, Series=C, Size / Dimension="0.079\"Lx0.049\"W(2.00mmx1.25mm)", Thickness (Max)="0.057\"(1.45mm)"
C4: library part CMP-2007-03657-1, Manufacturer=Kemet, Part Number=C0805C473K1RACTU
C5 C16: library part CMP-2006-02240-1, Manufacturer=Kemet, Part Number=C0603C105K4RACTU
C6: library part CMP-2006-03042-1, Manufacturer=Kemet, Part Number=C0603C103K4RACTU
C7: library part CMP-2006-03054-1, Manufacturer=Kemet, Part Number=C0603C104J4RACTU
C8: library part CMP-2000-06040-1, "Chip Capacitor, 2.2 uF, +/- 10%, 50 V, -55 to 125 degC, 0805 (2012 Metric), RoHS, Tape and Reel", Capacitance=2.2µF, Manufacturer=TDK, Operating Temperature=-55°C~125°C, Package / Case=0805(2012Metric), Package Description="2-Pin Surface Mount Device, Body 2 x 1.25 mm", Package Reference=0805, PCN Part Number=MLCCPartNumberChange30/Nov/2012, Ratings=-, Standard Package=1, Temperature Coefficient=X7R, Tolerance=±10%, Voltage - Rated=50V, Applications=GeneralPurpose, Catalog Drawings=CSERIES_2012-0805_1.45, Category=Capacitors, Datasheet URL=https://datasheet.ciiva.com/24216/c2012x7r1h225k125ac-265016-24216364.pdf, Datasheet Version=09/2013, Family=CeramicCapacitors, Features=-, Height - Seated (Max)=-, Kits=445-9015-KIT-ND-KITMLCC1000PF-47UF080510-50V445-9003-KIT-ND-KITCAPCERHICAPMLCCSMD445-173086-KIT-ND-C0402-2220X7R6.3-50V1,000PF-, Lead Spacing=-, Lead Style=-, Manufacturer URL=http://www.tdk.com/, Mounting Technology=SurfaceMount, Mounting Type=SurfaceMount,MLCC, Online Catalog=CSeries,GeneralPurpose, Other Names=445-5968-1, Packaging=CutTape(CT), Product Training Modules=CSeriesGeneralApplicationsSEAT,CCV,andTVCLDesignToolsGuidetoReplacinganElectrolyticCapacitorwithanMLCC, RoHS Information=RoHSCertificate-MLCC, Series=C, Size / Dimension="0.079\"Lx0.049\"W(2.00mmx1.25mm)", Thickness (Max)="0.057\"(1.45mm)"
C9: library part CMP-2006-02551-1, Manufacturer=Murata, Part Number=GRM1885C1H362JA01D
C10: library part CMP-2000-05453-1, "Chip Capacitor, 100 nF, +/- 10%, 100 V, -55 to 1255 degC, 0805 (2012 Metric), RoHS, Tape and Reel", Capacitance=0.1µF, Manufacturer=TDK, Operating Temperature=-55degC~125degC, Package / Case=0805(2012Metric), Package Description="2-Pin Surface Mount Device, Body 2 x 1.25 mm", Package Reference=0805, PCN Part Number=MLCCPartNumberChange30/Nov/2012, Ratings=-, Standard Package=1, Temperature Coefficient=X7R, Tolerance=±10%, Voltage - Rated=100V, Applications=GeneralPurpose, Catalog Drawings=CSERIES_2012-0805_1.45, Category=Capacitors, Datasheet URL=https://datasheet.ciiva.com/11788/0900766b80fc5cba-11788142.pdf, Datasheet Version=Jul-13, Family=CeramicCapacitors, Featured Product=C-SeriesMidVoltageMLCCs, Features=-, Height - Seated (Max)=-, Kits=SAMPLEKIT1008-ND-KITCAPCERMLCC100V-630V, Lead Spacing=-, Lead Style=-, Manufacturer URL=http://www.tdk.com/, Mounting Type=SurfaceMount,MLCC, Online Catalog=CSeries,MidVoltage, Other Names=445-1418-1, Packaging=CutTape(CT), Product Training Modules=HighCapacitanceReplacementSEAT,CCV,andTVCLDesignToolsGuidetoReplacinganElectrolyticCapacitorwithanMLCC, RoHS Information=RoHSCertificate-MLCC, Series=C, Size / Dimension="0.079\"Lx0.049\"W(2.00mmx1.25mm)", Thickness (Max)="0.057\"(1.45mm)"
C11 C18 C19 C20: library part CMP-2000-06049-1, "Chip Capacitor, 1 uF, +/- 10%, 100 V, -55 to 125 degC, 1206 (3216 Metric), RoHS, Tape and Reel", Capacitance=1µF, Manufacturer=TDK, Operating Temperature=-55°C~125°C, Package / Case=1206(3216Metric), Package Description="2-Pin Surface Mount Device, Body 3.2 x 1.6 mm", Package Reference=1206, PCN Part Number=MLCCPartNumberChange30/Nov/2012, Ratings=-, Standard Package=1, Temperature Coefficient=X7R, Tolerance=±10%, Voltage - Rated=100V, Applications=GeneralPurpose, Catalog Drawings=CSERIES_1206_1.8, Category=Capacitors, Datasheet URL=http://www.farnell.com/datasheets/1484596.pdf, Datasheet Version=08/2011, Family=CeramicCapacitors, Featured Product=C-SeriesMidVoltageMLCCs, Features=-, Height - Seated (Max)=-, Kits=SAMPLEKIT1008-ND-KITCAPCERMLCC100V-630V, Lead Spacing=-, Lead Style=-, Manufacturer URL=http://www.tdk.com/, Mounting Technology=SurfaceMount, Mounting Type=SurfaceMount,MLCC, Online Catalog=CSeries,MidVoltage, Other Names=445-4467-1, Package URL=https://product.tdk.com/info/en/documents/chara_sheet/C3216X7R1V106K160AC.pdf, Packaging=CutTape(CT), Product Training Modules=SEAT,CCV,andTVCLDesignToolsGuidetoReplacinganElectrolyticCapacitorwithanMLCC, RoHS Information=RoHSCertificate-MLCC, Series=C, Size / Dimension="0.126\"Lx0.063\"W(3.20mmx1.60mm)", Thickness (Max)="0.051\"(1.30mm)"
C12 C13 C14: library part CMP-2006-02517-1, Manufacturer=Murata, Part Number=GRM188R71C222KA01D
C15: library part CMP-2007-03234-1, Manufacturer=Kemet, Part Number=C0805C105K3RACTU
C17: library part CMP-1037-03996-1, "CAP 47nF 100V ±10% 1206 (3216 Metric) Thickness 1.7mm SMD", Case-EIA=1206, Case-Metric=3216, Rated Voltage="100 V", Tolerance=±10%, Max Thickness="1.7 mm", Technology=SMT
C21 C22 C23 C24 C25 C26 C27 C28 C29 C30 C31 C32: library part CMP-2006-02476-1, Manufacturer=Murata, Part Number=GRM188R72A222KA01D
C33 C34 C35: library part CMP-2006-04183-1, Manufacturer="AVX Interconnect / Elco", Part Number=06033C473JAT2A
C36 C37 C38: library part CMP-2006-04486-1, Manufacturer="AVX Interconnect / Elco", Part Number=0603YC102KAT2A
C39 C40: library part CMP-0011224-2, "CAP, AL, 330 uF, 100 V, +/- 20%, 0.153 ohm, AEC-Q200 Grade 2, SMD", Cap_Case=K16, Manufacturer=Panasonic, Supplier Part Number 1=PCE3505CT-ND, Tolerance_%=20%, Value1="0.153 ohm", Value2=100V, ValueDisplayed=330uF, AEC Category=Q200, AEC Grade=2, AEC Qualified=Y, Cap_F=330µF, ComponentLink1Description="Datasheet link", ComponentLink1URL=https://industrial.panasonic.com/cdbs/www-data/pdf/RDE0000/ABA0000C1181.pdf, CompType=Capacitor, ESR_ohm=1.53d, IRMS_A=9.17dA, LatestRevisionDate=2017-03-09, MountType=SMT, PackageReference="SMT Radial K16", PartNumber=EEV-FK2A331M, Polarized=Y, Publisher="Texas Instruments", RoHS=Y, Series=FK, SizeArea_mm2=399, SizeAreaWB_mm2=483, SizeX_mm=21, SizeY_mm=19, SizeZ_mm=16.5, Supplier 1=Digi-Key, Supplier 2=Mouser, Supplier Part Number 2=667-EEV-FK2A331M, TaMax_C=105°C, TaMin_C=-55°C, Technology=AL, U/M=EA, VDC_V=100V
D1: library part CMP-2000-07540-1, "High Voltage Schottky Barrier Rectifier, 200 V, 1 A, -65 to 175 degC, 2-Pin SMD, RoHS, Tape and Reel", Average Rectified Current=1A, Capacitance=23pF, Forward Voltage=850mV, Manufacturer="Diodes Inc", Max Forward Surge Current (Ifsm)=40A, Max Operating Temperature=150degC, Max Repetitive Reverse Voltage (Vrrm)=200V, Min Operating Temperature=-65degC, Package Description="2-Pin Small Outline Diode, Body 2.8 x 1.78 mm", Package Quantity=3000, Package Reference=POWERDI123-2_A, Peak Reverse Current=2uA, Contact Plating=Matte, Current Rating=1A, Datasheet URL=https://www.diodes.com/assets/Datasheets/ds30628.pdf, Datasheet Version="Rev. 6-2, 10/2008", Element Configuration=Single, Forward Current=1A, Height=0.98mm, Lead Free=LeadFree, Length=2.8mm, Manufacturer URL=http://www.diodes.com/, Mount=SurfaceMount, Mounting Technology=SurfaceMount, Number of Pins=2, Output Current=1A, Packaging=TapeandReel, Peak Non-Repetitive Surge Current=40A, Polarity=Standard, Radiation Hardening=No, REACH SVHC=NoSVHC, Reverse Voltage (DC)=200V, RoHSCompliant=true, Termination=SMD/SMT, Voltage Rating (DC)=200V, Width=1.78mm
DS1: library part CMP-2000-07593-1, "LED Red, 75 mW, 54 mcd, -55 to 85 degC, 2-Pin SMD, RoHS, Tape and Reel", Case\/Package=0805, Case Code (Metric)=2012, Colour=Red, Forward Current=30mA, Forward Voltage=2V, Lens Colour=Colorless, Manufacturer=Lite-On, Max Operating Temperature=85degC, Min Operating Temperature=-55degC, Package Description="2-Pin Surface Mount Device, Body 2 x 1.25 mm", Package Quantity=1, Package Reference=C170KRKT, Power Dissipation=75mW, Test Current=20mA, Case Code (Imperial)=0805, Datasheet URL=http://optoelectronics.liteon.com/upload/download/DS-22-99-0150/LTST-C170KRKT.pdf, Datasheet Version="Rev. D, 11/2014", Depth=1.6mm, Dominant Wavelength=631nm, Height=1.1mm, Illumination Colour=Red, Lead Free=LeadFree, Length=3.2mm, Lens Style=Rectangular, Lens Transparency=Clear, Luminous Intensity=54mcd, Manufacturer URL=http://www.us.liteon.com/, Mount=SurfaceMount, Mounting Technology=SurfaceMount, Number of Elements=1, Number of LEDs=1, Number of Pins=2, Packaging=TapeandReel, Power Rating=75mW, Radiation Hardening=No, RoHSCompliant=True, Viewing Angle=130degrees, Wavelength=639nm, Width=1.25mm
IC1: "Integrated Circuit", Manufacturer_Name="Texas Instruments", Mouser Part Number=595-LM324LVIDR, Datasheet Link=http://www.ti.com/lit/gpn/lm324lv, Height=1.75mm, Manufacturer_Part_Number=LM324LVIDR, Mouser Price/Stock=https://www.mouser.com/Search/Refine.aspx?Keyword=595-LM324LVIDR
L1: library part CMP-1396-00019-1, "SMD-Shielded Power Inductor WE-PD, L=330 µH", Inductance="330 µH", Manufacturer="Wuerth Elektronik", ComponentLink1Description="Manufacturer URL", ComponentLink1URL=http://www.we-online.com, ComponentLink2Description=Datasheet, ComponentLink2URL=http://www.we-online.de/katalog/media/pdf/7447714331.pdf, PackageReference="WE-PD 1050", PartNumber=7447714331
Q1 Q2 Q3 Q4 Q5 Q6: "Transistor", Manufacturer_Name="Texas Instruments", Mouser Part Number=595-CSD19532Q5B, Datasheet Link=http://www.ti.com/lit/gpn/csd19532q5b, Manufacturer_Part_Number=CSD19532Q5B, Mouser Price/Stock=https://www.mouser.com/Search/Refine.aspx?Keyword=595-CSD19532Q5B
R1 R2 R3 R4 R20 R21: library part CMP-2000-03381-1, Manufacturer="Vishay Dale", Part Number=CRCW060347K0JNEA
R5 R6 R7 R8 R9 R10 R11 R12 R16 R17 R18 R19: library part CMP-2000-00700-1, Manufacturer=Panasonic, Part Number=ERJ-3GEY0R00V
R13 R30: library part CMP-2000-01968-1, Manufacturer=Susumu, Part Number=RG1608P-103-B-T5
R14: library part CMP-2000-00703-1, Manufacturer=Panasonic, Part Number=ERJ-3GEYJ102V
R15: library part CMP-2000-00435-1, Case/Package=0603, Case Code (Metric)=1608, Manufacturer=Panasonic, Max Operating Temperature=155°C, Max Power Dissipation=100mW, Min Operating Temperature=-55°C, Package Quantity=5000, Resistance=330R, Supplier Part Number 1=85Y8676, Temperature Coefficient=100ppm/°C, Tolerance=1%, Voltage Rating=75V, Case Code (Imperial)=0603, ComponentLink1Description=https://datasheet.ciiva.com/7886/aoa0000ce2-7886729.pdf?src-supplier=Element14, ComponentLink1URL=https://datasheet.ciiva.com/7886/aoa0000ce2-7886729.pdf?src-supplier=Element14, ComponentLink2Description=https://datasheet.ciiva.com/48531/aoa0000ce2-48531001.pdf?src-supplier=Avnet, ComponentLink2URL=https://datasheet.ciiva.com/48531/aoa0000ce2-48531001.pdf?src-supplier=Avnet, ComponentLink3Description=https://datasheet.ciiva.com/22721/426256-22721099.pdf?src-supplier=Element14, ComponentLink3URL=https://datasheet.ciiva.com/22721/426256-22721099.pdf?src-supplier=Element14, ComponentLink4Description=https://datasheet.ciiva.com/46373/1678782-46373899.pdf?src-supplier=Element14, ComponentLink4URL=https://datasheet.ciiva.com/46373/1678782-46373899.pdf?src-supplier=Element14, ComponentLink5Description=https://datasheet.ciiva.com/9117/aoa0000ce2-9117132.pdf?src-supplier=Avnet, ComponentLink5URL=https://datasheet.ciiva.com/9117/aoa0000ce2-9117132.pdf?src-supplier=Avnet, ComponentLink6Description=https://datasheet.ciiva.com/46373/1678782-46373900.pdf?src-supplier=Element14, ComponentLink6URL=https://datasheet.ciiva.com/46373/1678782-46373900.pdf?src-supplier=Element14, Composition="Thick Film", Contact Plating=Tin, Depth=0.8mm, Features="Automotive AEC-Q200", Height=0.45mm, Lead Free="Lead Free", Length=1.6mm, Manufacturer Part Number=ERJ3EKF3300V, Military Standard=Not, Mount="Surface Mount", Number of Pins=2, Number of Terminations=2, Packaging="Tape and Reel", Part Number=ERJ3EKF3300V, Power Rating=100mW, Radiation Hardening=No, REACH SVHC="No SVHC", RoHS=Yes, Stock 1=0, Supplier 1=Newark, Termination=SMD/SMT, Voltage Rating (DC)=75V, Weight=7.1E-05oz, Width=0.8mm
R22 R23 R31 R32: library part CMP-2000-03572-1, Manufacturer="Vishay Dale", Part Number=CRCW060375K0JNEA
R24 R27 R28: library part CMP-2000-03471-1, Case/Package=0603, Case Code (Metric)=1608, Manufacturer="Vishay Dale", Max Operating Temperature=155°C, Max Power Dissipation=100mW, Min Operating Temperature=-55°C, Package Quantity=10, Resistance=56R, Supplier Part Number 1=CRCW060356R0FKEA-CUTT, Temperature Coefficient=100ppm/°C, Tolerance=1%, Voltage Rating=75V, Case Code (Imperial)=0603, ComponentLink1Description=https://datasheet.ciiva.com/11810/0900766b80d98afc-11810033.pdf?src-supplier=RSComponents, ComponentLink1URL=https://datasheet.ciiva.com/11810/0900766b80d98afc-11810033.pdf?src-supplier=RSComponents, ComponentLink2Description=https://datasheet.ciiva.com/7672/1697337-7672917.pdf?src-supplier=Element14, ComponentLink2URL=https://datasheet.ciiva.com/7672/1697337-7672917.pdf?src-supplier=Element14, ComponentLink3Description=https://datasheet.ciiva.com/16883/dcrcwe3-16883910.pdf?src-supplier=Avnet+Europe, ComponentLink3URL=https://datasheet.ciiva.com/16883/dcrcwe3-16883910.pdf?src-supplier=Avnet+Europe, ComponentLink4Description=https://datasheet.ciiva.com/2465/dcrcwe3-2465642.pdf?src-supplier=Digi-Key, ComponentLink4URL=https://datasheet.ciiva.com/2465/dcrcwe3-2465642.pdf?src-supplier=Digi-Key, ComponentLink5Description=https://datasheet.ciiva.com/16507/dcrcw-16507994.pdf?src-supplier=Future+Electronics, ComponentLink5URL=https://datasheet.ciiva.com/16507/dcrcw-16507994.pdf?src-supplier=Future+Electronics, ComponentLink6Description=https://datasheet.ciiva.com/16785/70201119-16785354.pdf?src-supplier=Allied+Electronics, ComponentLink6URL=https://datasheet.ciiva.com/16785/70201119-16785354.pdf?src-supplier=Allied+Electronics, ComponentLink7Description=https://datasheet.ciiva.com/2465/dcrcwe3-2465643.pdf?src-supplier=Digi-Key, ComponentLink7URL=https://datasheet.ciiva.com/2465/dcrcwe3-2465643.pdf?src-supplier=Digi-Key, ComponentLink8Description=https://datasheet.ciiva.com/3257/dcrcwe3-3257739.pdf?src-supplier=Avnet, ComponentLink8URL=https://datasheet.ciiva.com/3257/dcrcwe3-3257739.pdf?src-supplier=Avnet, ComponentLink9Description=https://datasheet.ciiva.com/22704/1697337-22704443.pdf?src-supplier=Element14, ComponentLink9URL=https://datasheet.ciiva.com/22704/1697337-22704443.pdf?src-supplier=Element14, ComponentLink10Description=https://datasheet.ciiva.com/2465/dcrcwe3-2465644.pdf?src-supplier=Digi-Key, ComponentLink10URL=https://datasheet.ciiva.com/2465/dcrcwe3-2465644.pdf?src-supplier=Digi-Key, ComponentLink11Description=https://datasheet.ciiva.com/3257/dcrcwe3-3257740.pdf?src-supplier=Avnet, ComponentLink11URL=https://datasheet.ciiva.com/3257/dcrcwe3-3257740.pdf?src-supplier=Avnet, Composition="Thick Film", Contact Plating=Tin, Depth=0.85mm, Features="Automotive AEC-Q200", Height=0.45mm, Lead Free="Lead Free", Length=1.55mm, Manufacturer Part Number=CRCW060356R0FKEA, Military Standard=Not, Number of Pins=2, Number of Terminations=2, Packaging="Tape and Reel", Part Number=CRCW060356R0FKEA, Power Rating=100mW, Pricing 1="1=0.09800, 250=0.00660, 750=0.00620, 1500=0.00590, 2500=0.00580 (USD)", Radiation Hardening=No, REACH SVHC=Unknown, RoHS=Yes, Stock 1=319717, Supplier 1="Future Electronics", Termination=SMD/SMT, Voltage Rating (DC)=75V, Weight=7.1E-05oz, Width=0.85mm
R25: library part CMP-1012-00216-1, "2R61 0.1W 1% 0603 (1608 Metric)  SMD", Case-EIA=0603, Case-Metric=1608, Power="0.1 W", Tolerance="1 %", Technology=SMT
R26: library part CMP-2000-03834-1, Manufacturer="Vishay Dale", Part Number=CRCW0603107KFKEA
R29: library part CMP-2000-00395-1, Manufacturer=Panasonic, Part Number=ERJ-3EKF2743V
R33: library part CMP-2000-02148-1, Manufacturer=Susumu, Part Number=RG1608P-2611-B-T5
R34: library part CMP-2001-00814-1, Manufacturer=Panasonic, Part Number=ERA6AEB3833V
R35 R40 R41 R42 R55 R56 R57: library part CMP-2001-04896-1, Case/Package=0805, Case Code (Metric)=2012, Manufacturer="Vishay Dale", Max Operating Temperature=155°C, Max Power Dissipation=125mW, Min Operating Temperature=-55°C, Package Quantity=1, Resistance=0mR, Supplier Part Number 1=541-0.0ACT-ND, Temperature Coefficient=100ppm/°C, Tolerance=1%, Voltage Rating=150V, Case Code (Imperial)=0805, ComponentLink1Description=https://datasheet.ciiva.com/11811/0900766b80d98b26-11811304.pdf?src-supplier=RSComponents, ComponentLink1URL=https://datasheet.ciiva.com/11811/0900766b80d98b26-11811304.pdf?src-supplier=RSComponents, ComponentLink2Description=https://datasheet.ciiva.com/26314/fld-crcw-e3-data-en-26314630.pdf?src-supplier=Distrelec, ComponentLink2URL=https://datasheet.ciiva.com/26314/fld-crcw-e3-data-en-26314630.pdf?src-supplier=Distrelec, ComponentLink3Description=https://datasheet.ciiva.com/5543/dcrcwe3-109170-5543096.pdf?src-supplier=Mouser, ComponentLink3URL=https://datasheet.ciiva.com/5543/dcrcwe3-109170-5543096.pdf?src-supplier=Mouser, ComponentLink4Description=https://datasheet.ciiva.com/16389/dcrcwe3-16389338.pdf?src-supplier=Future+Electronics, ComponentLink4URL=https://datasheet.ciiva.com/16389/dcrcwe3-16389338.pdf?src-supplier=Future+Electronics, ComponentLink5Description=https://datasheet.ciiva.com/16719/70201119-16719706.pdf?src-supplier=Allied+Electronics, ComponentLink5URL=https://datasheet.ciiva.com/16719/70201119-16719706.pdf?src-supplier=Allied+Electronics, ComponentLink6Description=https://datasheet.ciiva.com/2463/dcrcwe3-2463037.pdf?src-supplier=Digi-Key, ComponentLink6URL=https://datasheet.ciiva.com/2463/dcrcwe3-2463037.pdf?src-supplier=Digi-Key, ComponentLink7Description=https://datasheet.ciiva.com/7841/1697337-7841629.pdf?src-supplier=Element14, ComponentLink7URL=https://datasheet.ciiva.com/7841/1697337-7841629.pdf?src-supplier=Element14, ComponentLink8Description=https://datasheet.ciiva.com/2463/dcrcwe3-2463038.pdf?src-supplier=Digi-Key, ComponentLink8URL=https://datasheet.ciiva.com/2463/dcrcwe3-2463038.pdf?src-supplier=Digi-Key, ComponentLink9Description=https://datasheet.ciiva.com/2463/dcrcwe3-2463039.pdf?src-supplier=Digi-Key, ComponentLink9URL=https://datasheet.ciiva.com/2463/dcrcwe3-2463039.pdf?src-supplier=Digi-Key, ComponentLink10Description=https://datasheet.ciiva.com/7841/1720486-7841839.pdf?src-supplier=Element14, ComponentLink10URL=https://datasheet.ciiva.com/7841/1720486-7841839.pdf?src-supplier=Element14, ComponentLink11Description=https://datasheet.ciiva.com/16883/dcrcwe3-16883622.pdf?src-supplier=Avnet+Europe, ComponentLink11URL=https://datasheet.ciiva.com/16883/dcrcwe3-16883622.pdf?src-supplier=Avnet+Europe, Composition="Thick Film", Contact Plating=Tin,Lead, Depth=1.25mm, Features="Automotive AEC-Q200", Height=0.45mm, Lead Free="Lead Free", Length=2mm, Manufacturer Part Number=CRCW08050000Z0EA, Military Standard=Not, Number of Terminations=2, Packaging="Tape and Reel", Part Number=CRCW08050000Z0EA, Power Rating=125mW, Pricing 1="1=0.10000, 10=0.04400, 25=0.03160, 50=0.02420, 100=0.01780, 250=0.01360, 500=0.01090, 1000=0.00802 (USD)", Radiation Hardening=No, REACH SVHC=Unknown, RoHS=Yes, Stock 1=236690, Supplier 1=Digi-Key, Termination=SMD/SMT, Voltage Rating (DC)=150V, Weight=0.000194oz, Width=1.25mm
R36: library part CMP-2001-00897-1, Manufacturer=Panasonic, Part Number=ERA6AEB9761V
R37 R38 R39 R46 R47 R48: library part CMP-2001-03795-1, Manufacturer="Vishay Dale", Part Number=CRCW08052R70JNEA
R43 R44 R45: library part CMP-2000-03279-1, Manufacturer="Vishay Dale", Part Number=CRCW0603383KFKEA
R49 R50 R51: library part CMP-2000-04170-1, Manufacturer=Yageo, Part Number=RC0603FR-079K76L
T1 T2 T3 T4 T5: library part "Redcube 7461057", "Screw Terminal", Supplier 1=Digi-Key, Supplier 2=Mouser
TP1 TP2 TP3 TP4 TP5 TP6: library part CMP-2000-05183-1, "Test Point, White, SMT", Manufacturer=Keystone, Contact Plating=Silver, Datasheet URL=https://datasheet.ciiva.com/1123/5015-1123862.pdf, Datasheet Version=Mar-14, Finish Plating=SilverPlate, Height=0.06In., Length="0.105\"(2.667mm)", Manufacturer URL=http://www.keyelco.com/, Material=PhosphorBronze, Material, Contact=PhosphorBronze, Mounting=SurfaceMount, Mounting Type=SurfaceMount, Primary Type=PCBTestPoints, Style=Miniature, Termination=SMT, Thickness=0.010In., Type=TestPointsonTapeandReel
X1: library part HEADER_POS12_?43045-1200, Package=43045-1200, DeviceName=43045-1200, DeviceSetName=HEADER_POS12_?, GateName_1=G$1, LibraryName=con-molex-micro-fit-3_0_2, SymbolName_1=HEADER_POS12
X2: library part HEADER_POS10_?43045-1000, Package=43045-1000, DeviceName=43045-1000, DeviceSetName=HEADER_POS10_?, GateName_1=G$1, LibraryName=con-molex-micro-fit-3_0_2, SymbolName_1=HEADER_POS10
X3: library part HEADER_POS4_?43045-0401, Package=43045-0400, DeviceName=43045-0401, DeviceSetName=HEADER_POS4_?, GateName_1=G$1, LibraryName=con-molex-micro-fit-3_0_2, SymbolName_1=HEADER_POS4

## Free pads (board coordinates)
  round 1.524 hole 3.175: 3(10.6,111.5) 3(63.45,36.4) 3(103.3,36.4) 3(103.3,111.5)

## Via types
v1: diameter 0.5, hole 0.2, Top Layer to Bottom Layer, 531 vias

## Nets (pads, with @x,y where several pads share a name; then routed paths per layer and width w, separated by ;. In a path a pad name is that pad's centre, name@x,y a point inside that pad or via, vN(x,y) a via of type N, cw(c..) or ccw(c..) an arc to the next point about the centre after c; other vN are vias at no path point)
5VD: IC1.4 U1.28 X2.P$1 X2.P$6 X3.P$1 | length 99.8
  Top Layer w0.254: v1(14,64.75) 14.097,64.847 IC1.4@14.097,66.249 ; v1(23.775,93.025) 28.526,93.025 30.245,94.744 U1.28@30.245,94.935 U1.28@30.008,94.698
  Layer 1 w0.254: v1(15.8,91.925) 16.717,92.842 23.592,92.842 v1(23.775,93.025) ; X2.P$6@30.1,105.431 X2.P$1@30.1,108.431 31.227,109.558 32.783,109.558 33.275,110.05 62.375,110.05 63.994,108.431 X3.P$1@64.95,108.431
  Bottom Layer w0.254: v1(14,64.75) 14,69.1 14.8,69.9 14.8,76.8 15.2,77.2 15.2,91.325 v1(15.8,91.925) ; v1(23.775,93.025) 24.075,93.325 24.075,99.406 X2.P$6@30.1,105.431
DRV_nCS/GAIN: R20.2 U1.65 U2.32 | length 44.4
  Top Layer w0.254: v1(29.575,62.275) 29.591,62.259 R20.2@29.591,61.341 29.666,61.341 29.989,61.664 29.989,61.739 34.675,66.425 34.675,67.9 35.157,68.382 v1(35.869,68.382) 36.46,68.973 U2.32@38.271,68.973
  Bottom Layer w0.254: U1.65@27.705,33.975 28.114,34.384 28.459,34.384 28.95,34.875 28.95,37.975 29.375,38.4 29.375,41.3 27.725,42.95 27.725,60.031 29.622,61.928 29.622,62.228 v1(29.575,62.275)
DRV_SCLK: R19.1 U1.44 | length 34.9
  Top Layer w0.254: v1(29.25,63.75) 29.337,63.837 R19.1@29.337,64.516
  Layer 1 w0.254: v1(22.875,38.875) 28.033,38.875 28.158,39 v1(28.225,39)
  Bottom Layer w0.254: U1.44@22.625,36.515 22.625,38.625 v1(22.875,38.875) ; v1(28.225,39) 28.225,41.25 26.925,42.55 26.925,61.425 v1(29.25,63.75)
DRV_SDI: R18.1 U1.46 | length 35.1
  Top Layer w0.254: v1(29.591,67.591) R18.1@29.591,68.754
  Bottom Layer w0.254: U1.46@27.705,36.515 27.486,36.734 27.486,37.964 26.075,39.375 26.075,65.325 28.341,67.591 v1(29.591,67.591)
DRV_SDO: R16.1 U1.45 | length 37.3
  Top Layer w0.254: v1(23.125,72) 23.243,71.882 R16.1@24.003,71.882
  Bottom Layer w0.254: v1(23.125,72) 23.125,40.35 25.165,38.31 U1.45@25.165,36.515
DRV_VM: C2.2 C3.2 R9.2 R12.2 U2.5 | length 6.3
  Top Layer w0.254: U2.5@45.071,68.973 46.882,68.973 v1(47.473,68.382) ; 50.882,68.382 51,68.5 ; R9.2@52.03,69.013 R9.2@52.03,69.088
  Top Layer w0.5: v1(47.473,68.382) 50.882,68.382
DVDD: C5.2 U2.40 | length 6.3
  Top Layer w0.254: v1(39.46,63.921) 40.421,64.882 U2.40@40.421,66.323
  Top Layer w0.5: C5.2@37.975,61.1 38,61.1 38.175,61.275 38.175,61.775 39.46,63.06 v1(39.46,63.921)
ENABLE: U1.14 U2.33 | length 41.2
  Top Layer w0.254: v1(35.869,67.512) 36.83,68.473 U2.33@38.271,68.473
  Layer 1 w0.254: v1(33.752,67.528) 33.76,67.52 35.861,67.52 v1(35.869,67.512) ; v1(36.95,87.425) 41.15,87.425 v1(41.175,87.4)
  Bottom Layer w0.254: v1(33.752,67.528) 33.752,75.977 34.9,77.125 34.9,80.888 36.1,82.088 36.1,84.512 36.95,85.362 v1(36.95,87.425) ; v1(41.175,87.4) 41.7,87.925 41.7,96.23 U1.14@42.945,97.475
GHA: C21.2 Q1.4 TP1.1 U2.8 | length 60.6
  Top Layer w0.254: U2.8@45.071,70.473 46.973,70.473 v1(47.5,71)
  Top Layer w0.5: TP1.1@64.2,85.6 64.4,85.8 v1(64.4,88.3) ; v1(79.4,90.9) 80.425,90.9 C21.2@80.525,90.8 80.525,90.75 80.96,90.315 80.96,90.084 81.939,89.105 Q1.4@82.27,89.105
  Layer 1 w0.5: v1(47.5,71) 47.5,71.091 47.551,71.142 56.358,71.142 56.6,70.9 64.3,70.9 64.905,71.505 v1(65.195,71.505) ; v1(64.4,88.3) 74.7,88.3 76.3,89.9 78.4,89.9 v1(79.4,90.9)
  Bottom Layer w0.5: v1(64.4,88.3) 64.4,82.647 65.16,81.887 65.16,71.54 v1(65.195,71.505)
GHB: C24.2 Q2.4 TP2.1 U2.17 | length 60.6
  Top Layer w0.254: U2.17@42.421,73.123 42.421,74.934 v1(43.012,75.525)